# Altium PCB MotorDrive.PcbDoc (part 1 of 2)
Units mm, origin at the board's own origin, x right, y up, seen from the top; angles counter-clockwise.
Board outline 50.27 x 51.27 mm, 4 copper layers (Top Layer, GND, VCC, Bottom Layer), stack 0.603 mm thick; 68 components, 46 nets, 234 pads, 649 vias.
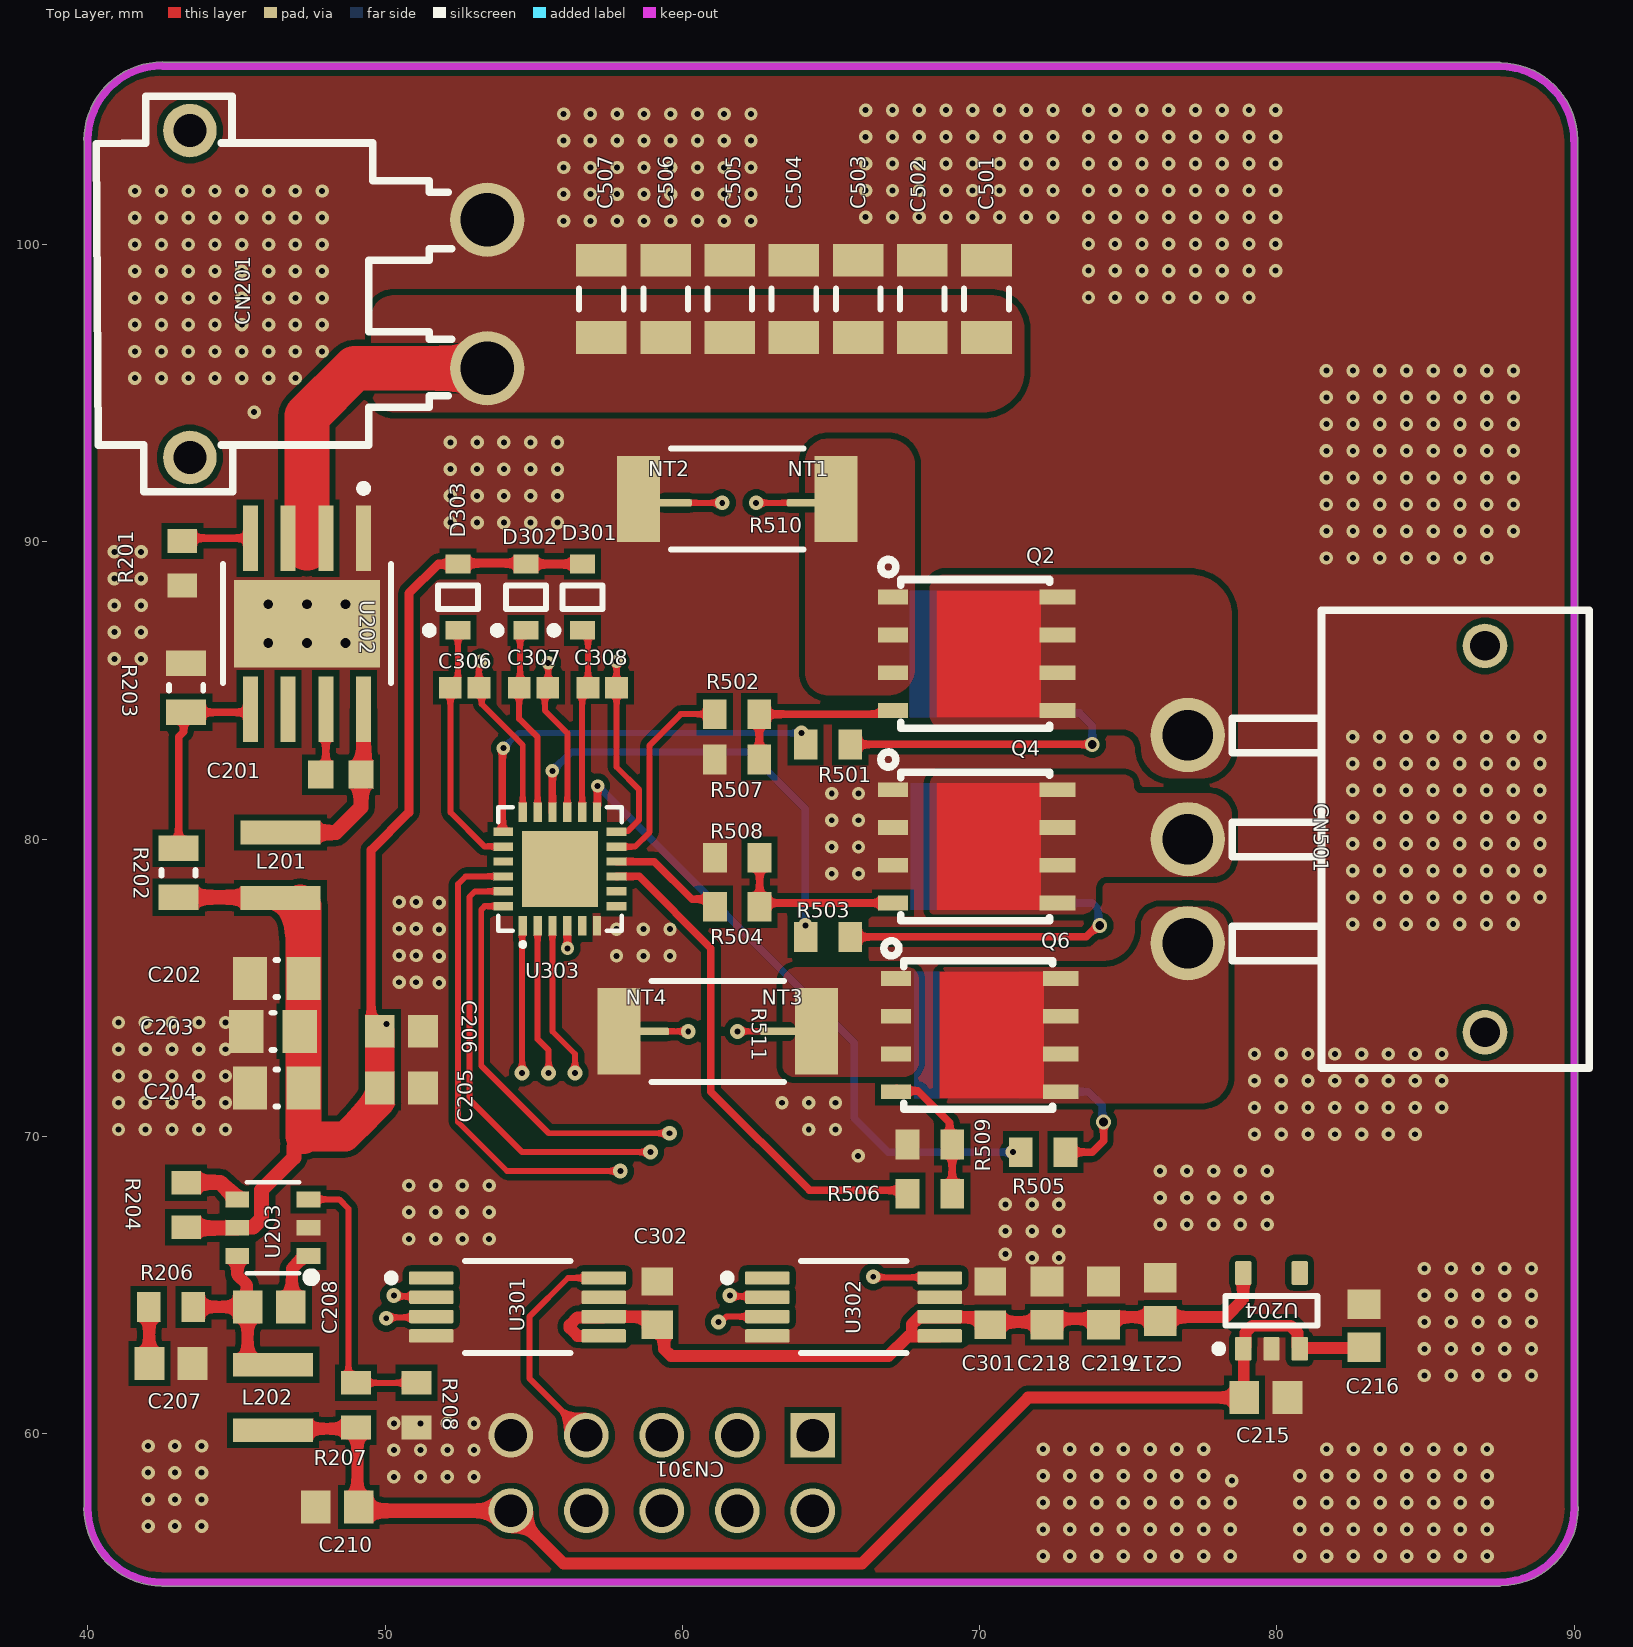
[diagram p0: Top Layer view]
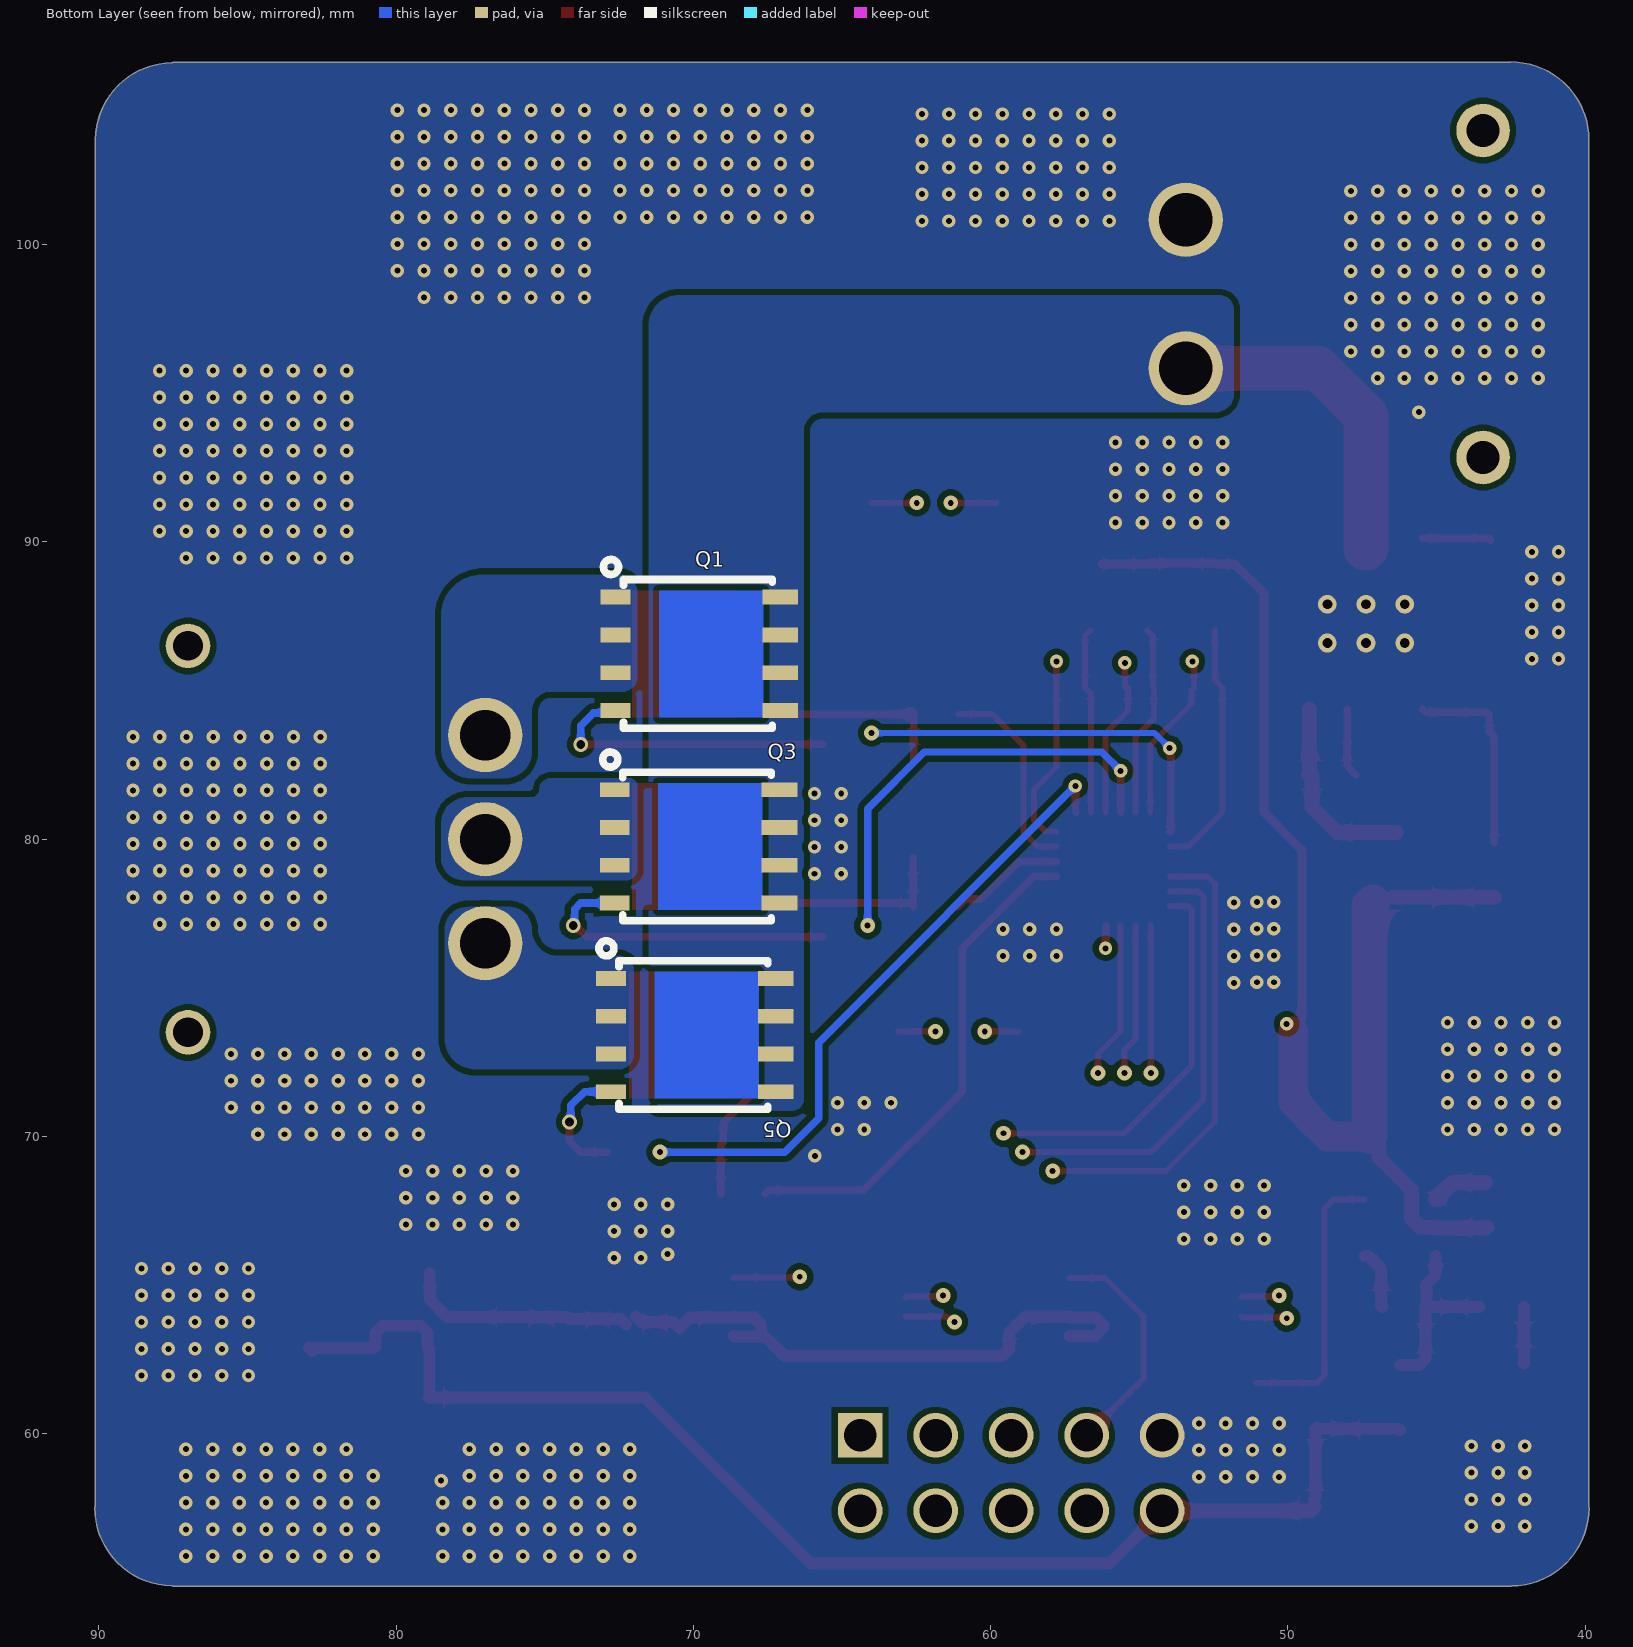
[diagram p1: Bottom Layer view, seen from below]
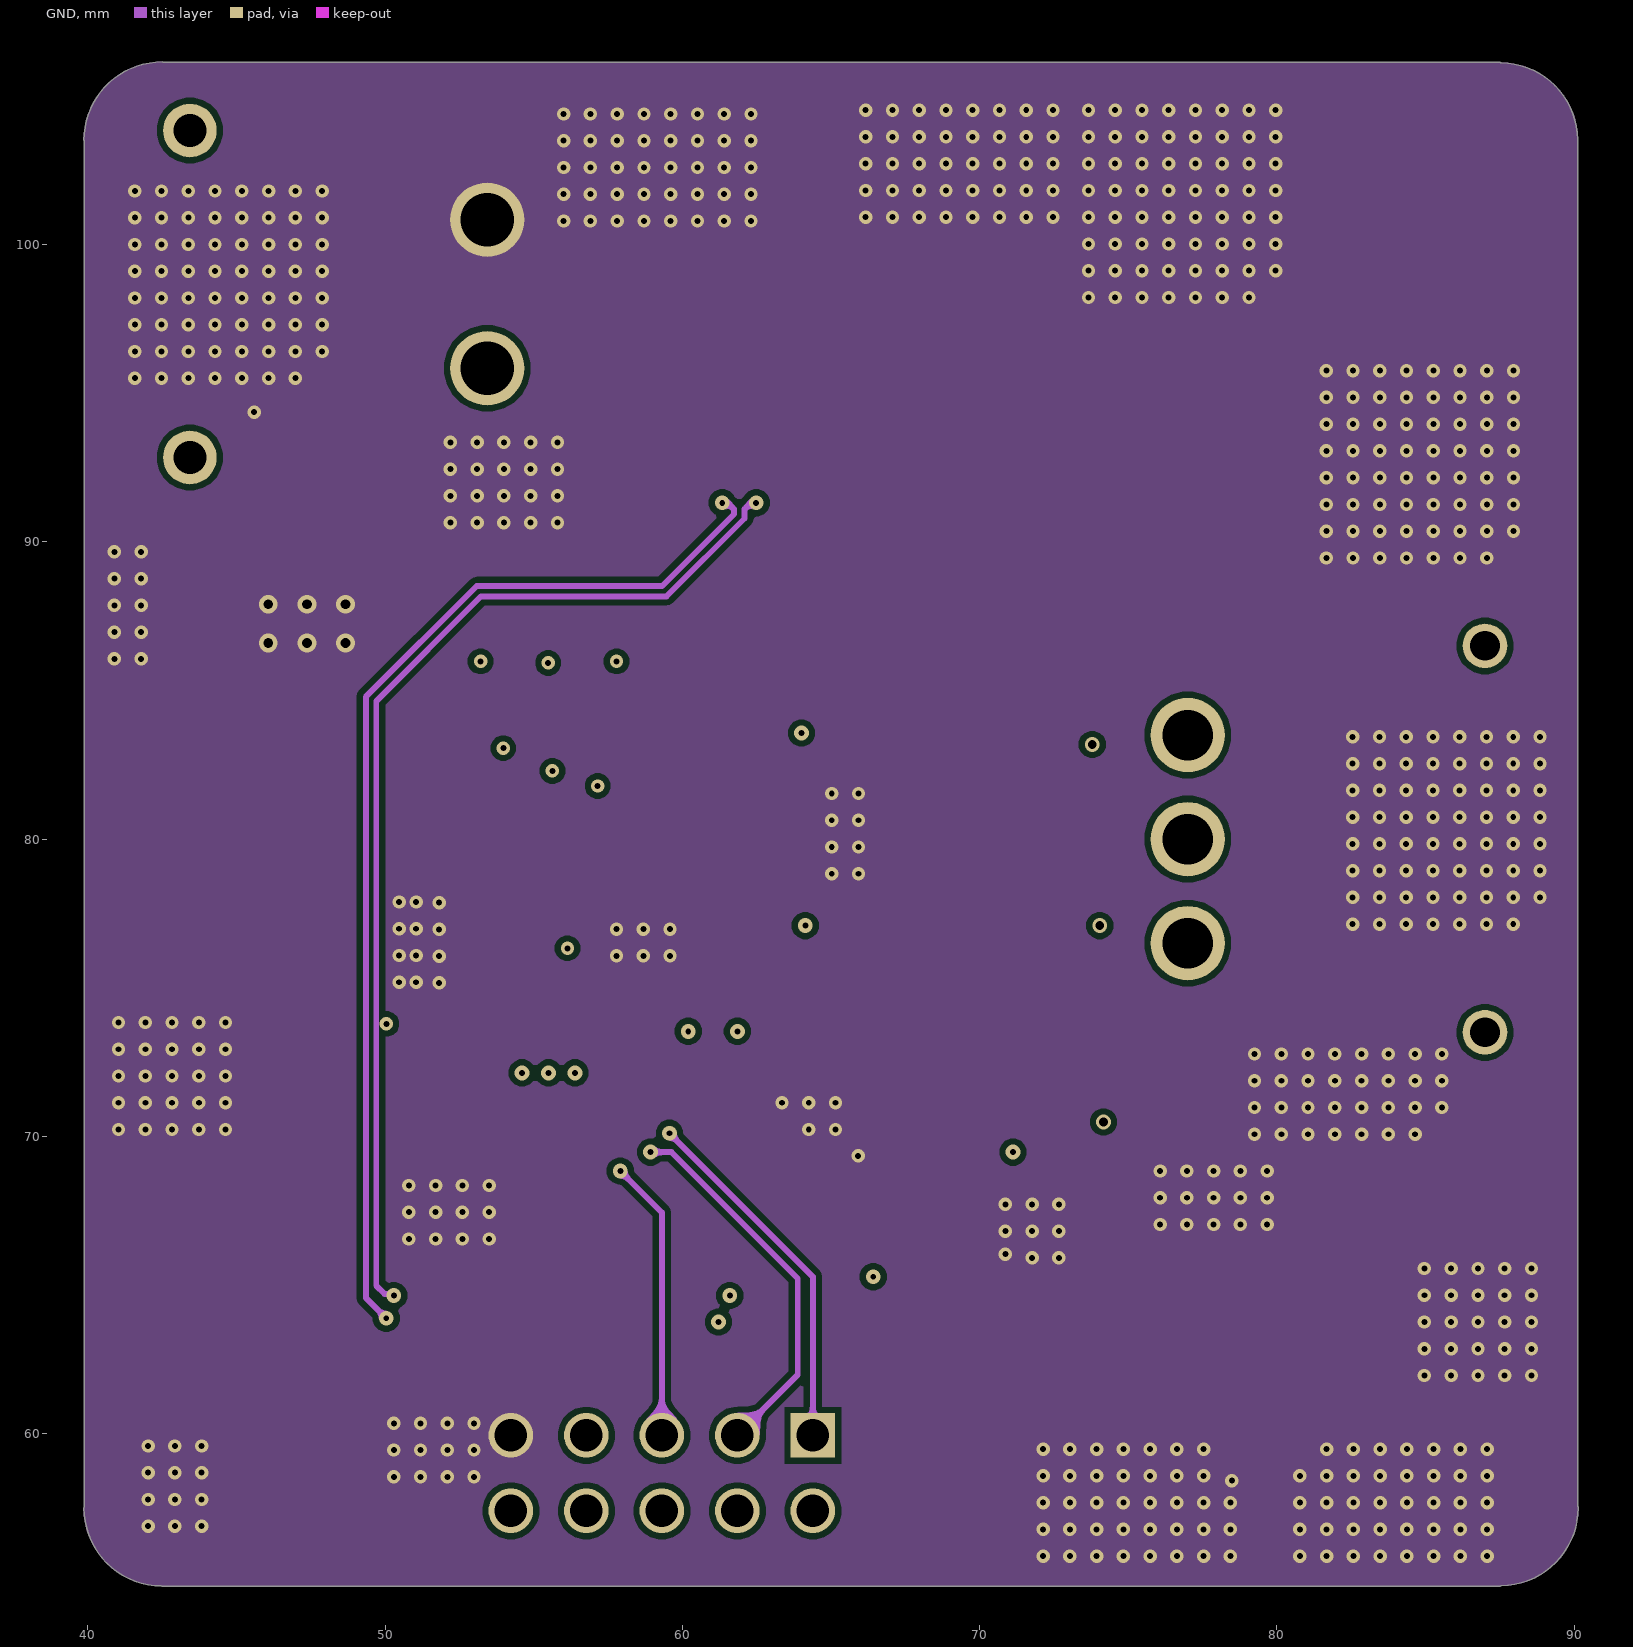
[diagram p2: GND]
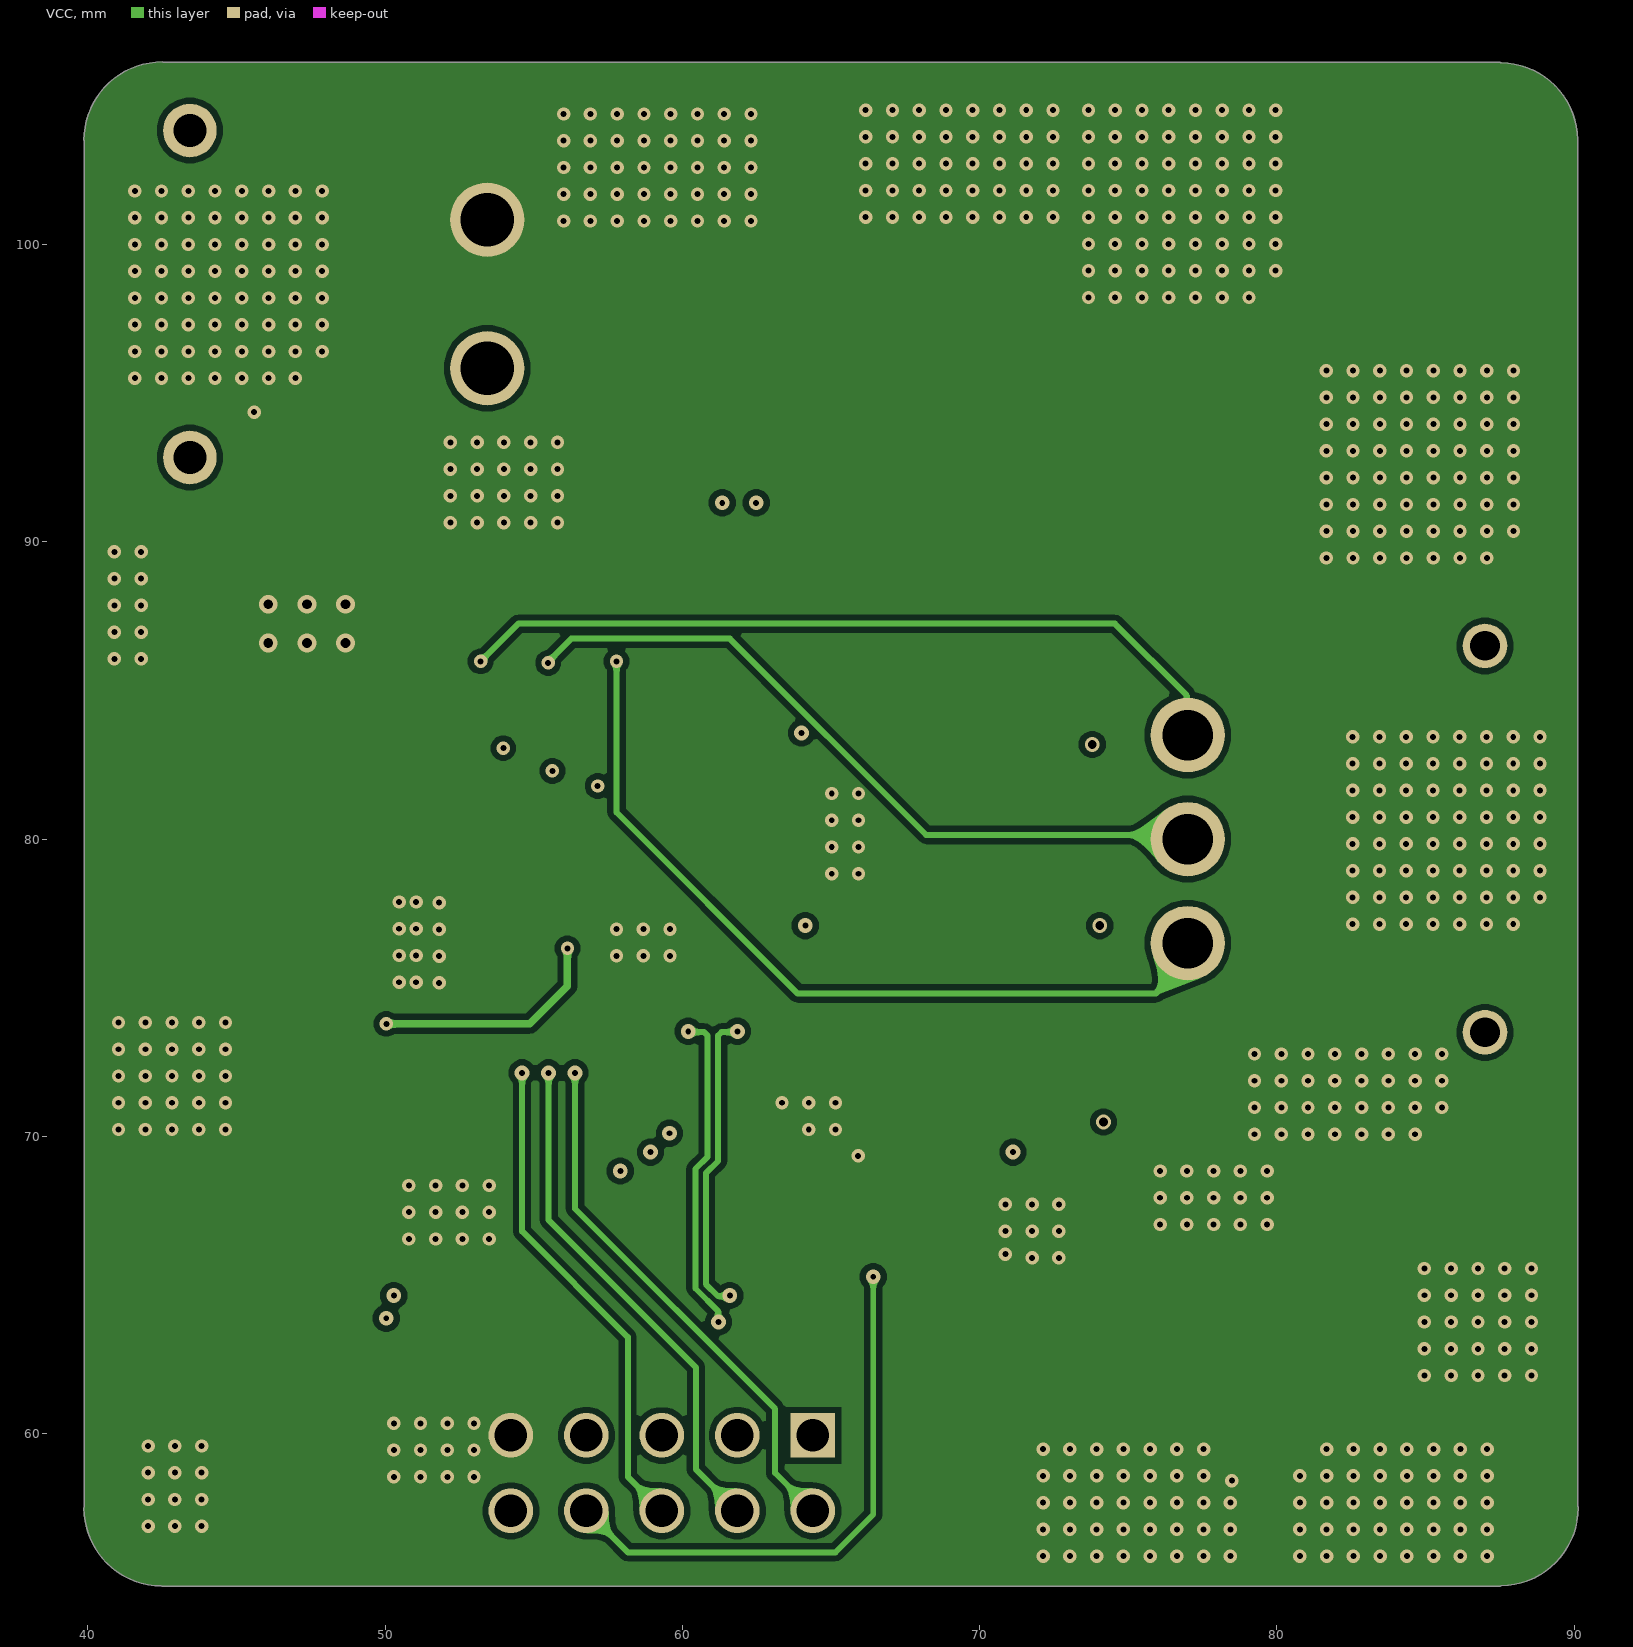
[diagram p3: VCC]
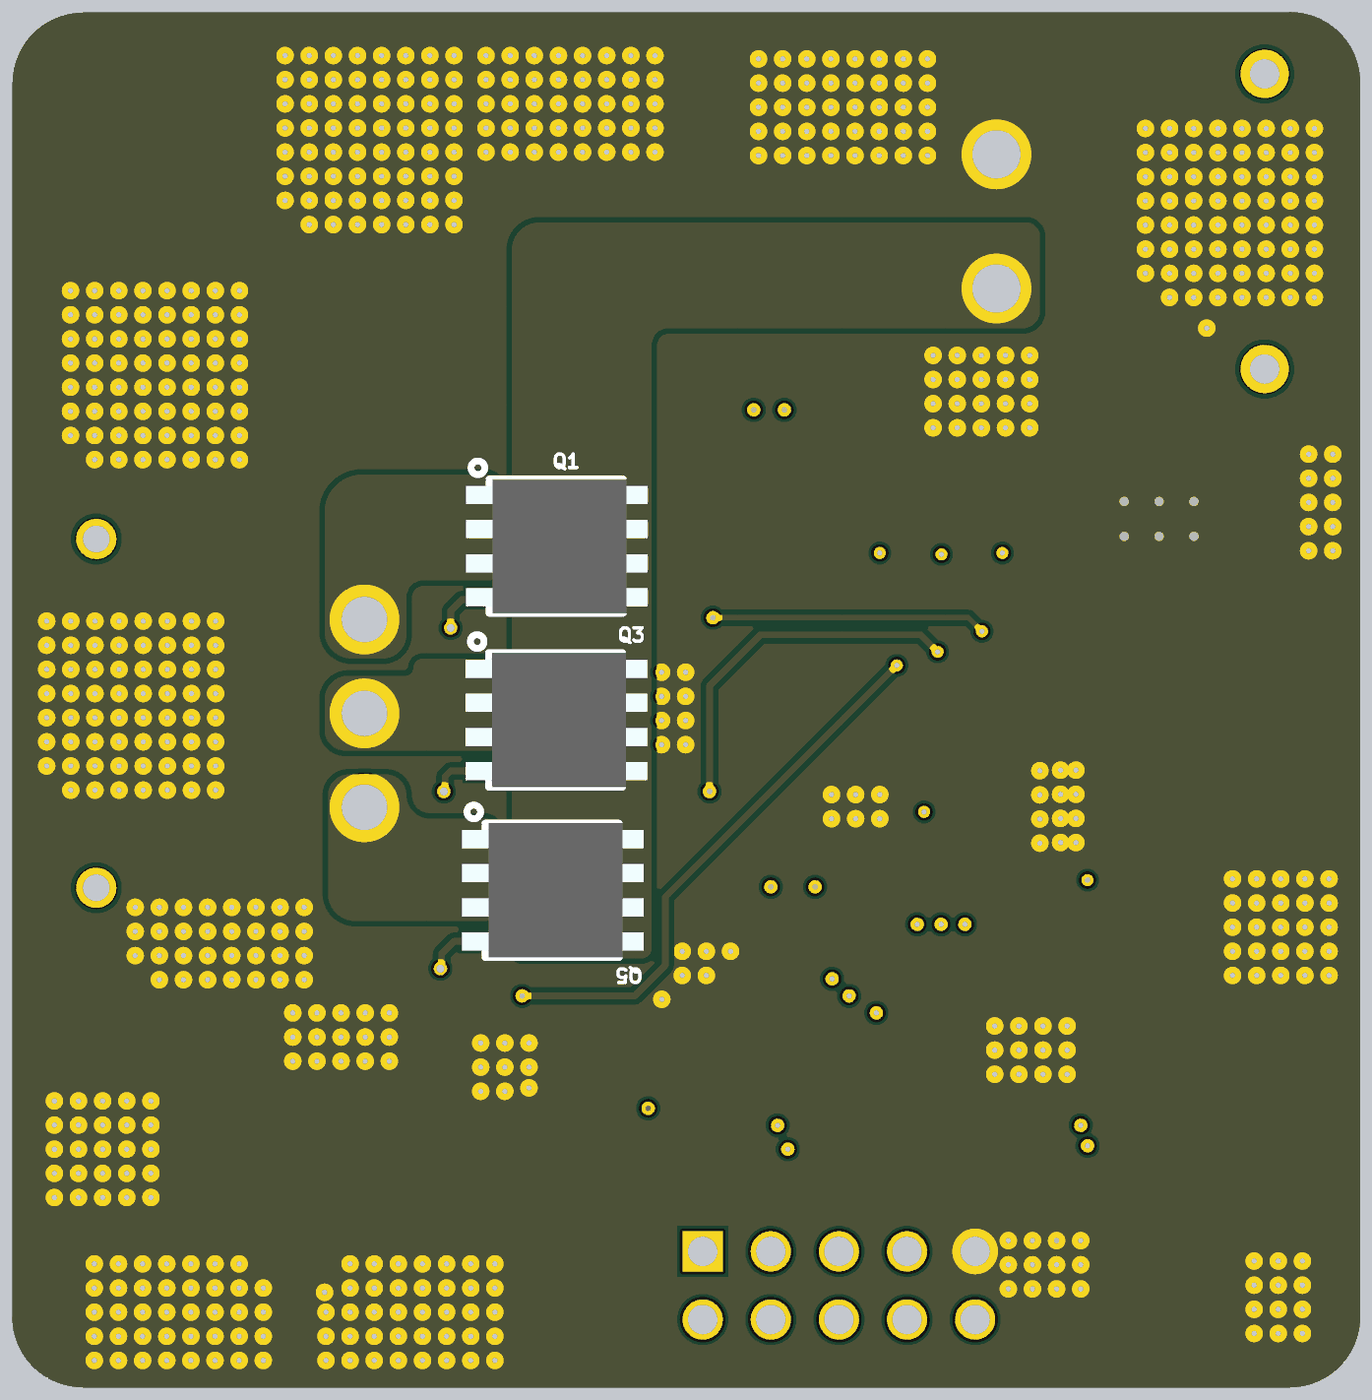
[diagram p4: 3D render of the assembled board from below, using the file's embedded part models]

## Layer stack, top to bottom
Top Solder: solder mask 0.0102, Solder Resist, Dk 3.5
Top Layer: signal copper 0.0356
Dielectric 2: prepreg 0.0711, PP-006, Dk 4.1
GND: signal copper 0.035
Dielectric 1: dielectric 0.32, FR-4, Dk 4.8
VCC: signal copper 0.035
Dielectric 3: prepreg 0.0711, PP-006, Dk 4.1
Bottom Layer: signal copper 0.0356
Bottom Solder: solder mask 0.0102, Solder Resist, Dk 3.5

## Board outline
42.473,54.875 cw(c42.496,57.502) 39.869,57.502 cw(c39.996,57.502) 39.873,57.532 39.873,103.491 cw(c39.998,103.516) 39.87,103.516 cw(c42.498,103.516) 42.498,106.143 cw(c42.498,106.016) 42.559,106.127 87.494,106.127 cw(c87.494,106) 87.539,106.119 cw(c87.494,103.492) 90.121,103.531 cw(c90,103.492) 90.127,103.492 90.127,57.548 cw(c90.007,57.507) 90.134,57.507 cw(c87.507,57.507) 87.55,54.88 cw(c87.507,55) 87.507,54.873 42.496,54.873 cw(c42.496,55)

## Design rules (kind name [scope] priority, off if disabled: settings)
Clearance [All] p1: gap=0.2 ignorepadtopadclearanceinfootprint=FALSE except(0: Arc-Hole Track-Hole SMDPad-Hole THPad-Hole Via-Hole Fill-Hole Poly-Hole Region-Hole Text-Hole; 0.013: Arc-SMDPad Arc-THPad Arc-Via Arc-Text Track-SMDPad Track-THPad Track-Via Track-Text SMDPad-SMDPad SMDPad-THPad SMDPad-Via SMDPad-Text THPad-THPad THPad-Via THPad-Text Via-Via Via-Text Fill-Text Poly-Text Region-Text Text-Text; 0.15: Arc-Arc Arc-Track Track-Track)
ComponentClearance [All] p1 off: gap=0.254 collisioncheckmode=3 verticalgap=0.254 showdistances=FALSE
DiffPairsRouting DiffPairsRouting_1 [InDifferentialPair ('NewDifferentialPair2')] p1: maxlimit=0.254 minlimit=0.15 mostfreqgap=0.254 toplayer_minwidth=0.381 toplayer_maxwidth=0.381 toplayer_prefwidth=0.381 midlayer1_minwidth=0.381 midlayer1_maxwidth=0.381 midlayer1_prefwidth=0.381 midlayer2_minwidth=0.381 midlayer2_maxwidth=0.381 midlayer2_prefwidth=0.381 bottomlayer_minwidth=0.381 bottomlayer_maxwidth=0.381 bottomlayer_prefwidth=0.381 maxuncoupledlength=12.7
DiffPairsRouting DiffPair_DiffPairsRouting [InDifferentialPair ('NewDifferentialPair1')] p2: maxlimit=0.254 minlimit=0.15 mostfreqgap=0.15 toplayer_maxgap=0.15 toplayer_minwidth=0.15 toplayer_maxwidth=0.381 toplayer_prefwidth=0.381 midlayer1_minwidth=0.15 midlayer1_maxwidth=0.381 midlayer1_prefwidth=0.381 midlayer2_minwidth=0.15 midlayer2_maxwidth=0.381 midlayer2_prefwidth=0.381 bottomlayer_maxgap=0.15 bottomlayer_minwidth=0.15 bottomlayer_maxwidth=0.381 bottomlayer_prefwidth=0.381 maxuncoupledlength=12.7
DiffPairsRouting [All] p3: maxlimit=0.15 minlimit=0.15 mostfreqgap=0.15 toplayer_minwidth=0.15 toplayer_maxwidth=0.381 toplayer_prefwidth=0.15 midlayer1_minwidth=0.15 midlayer1_maxwidth=0.381 midlayer1_prefwidth=0.15 midlayer2_minwidth=0.15 midlayer2_maxwidth=0.381 midlayer2_prefwidth=0.15 bottomlayer_minwidth=0.15 bottomlayer_maxwidth=0.381 bottomlayer_prefwidth=0.15 maxuncoupledlength=12.7
MatchedLengths [InDifferentialPair ('NewDifferentialPair2')] p1: tolerance=25.4 checknetsindiffpair=FALSE checkdiffpairvsdiffpair=TRUE checkxsignals=TRUE checkothers=TRUE
MatchedLengths DiffPair_MatchedLengths [InDifferentialPair ('NewDifferentialPair1')] p2: tolerance=25.4 checknetsindiffpair=FALSE checkdiffpairvsdiffpair=TRUE checkxsignals=TRUE checkothers=TRUE
MinimumSolderMaskSliver [All] p1 off: minsoldermaskwidth=0.01
PlaneConnect [All] p1: planeconnectstyle=Direct reliefexpansion=0.508 reliefentries=4 reliefconductorwidth=0.254 reliefairgap=0.254
PolygonConnect [All] p1: connectstyle=Direct reliefconductorwidth=0.254 reliefentries=4 polygonreliefangle="90 Angle" airgapwidth=0.254
RoutingVias [All] p1: holewidth=0.711 width=1.27 viastyle="Through Hole" minholewidth=0.1 minwidth=0.1 maxholewidth=10 maxwidth=10
SilkToSilkClearance [All] p1: silktosilkclearance=0
SilkToSolderMaskClearance [IsPad] p1: minsilkscreentomaskgap=0 clearancetoexposedcopper=TRUE
SolderMaskExpansion [All] p1: expansion=0.102 istentingtop=FALSE
Width [All] p1: maxlimit=10 minlimit=0.1 preferedwidth=0.2 minimp=50.000000 maximp=50.000000 favimp=50.000000
24 further rules are at their usual default settings.

## Classes and differential pairs
component class MOSFETS: C501 C502 C503 C504 C505 C506 C507 CN501 NT1 NT2 NT3 NT4 Q1 Q2 Q3 Q4 Q5 Q6 R501 R502 R503 R504 R505 R506 R507 R508 R509 R510 R511
component class Designator: C201 C202 C203 C204 C205 C206 C207 C208 C210 C215 C216 C217 C218 C219 CN201 L201 L202 R201 R202 R203 R204 R206 R207 R208 U202 U203 U204
differential pair SH1: +SH1_P -SH1_N
differential pair SH2: +SH2_P -SH2_N

## Components (designator, comment, footprint, x,y, rotation, side; value= is the part's Value field where it differs from the comment)
C201 "22uf" CAPC1608X90X35NL10T15 48.514,82.169 r0 top
C202 "100nf" CAPC0805(2012)145_N 46.355,75.311 r0 top value=220nF
C203 "22uf" CAPC0805(2012)145_N 46.228,73.533 r0 top value=220nF
C204 "22uf" CAPC0805(2012)145_N 46.355,71.628 r0 top value=220nF
C205 "4.7uf" CAPC1608X87X35ML15T15 50.546,71.628 r180 top
C206 "100nf" CAPC1608X87X35ML15T15 50.546,73.533 r180 top
C207 "470pf" CAPC1608X87X35ML15T15 42.799,62.357 r0 top
C208 "100nf" CAPC1608X87X35ML15T15 46.101,64.262 r0 top
C210 "10uf" CAPC1608X87X35ML15T15 48.387,57.531 r0 top
C215 "100nd" CAPC1608X87X35ML15T15 79.629,61.214 r180 top
C216 "22uf" CAPC1608X87X35ML15T15 82.931,63.627 r270 top
C217 "100nf" CAPC1608X87X35ML15T15 76.073,64.516 r270 top
C218 "22uf" CAPC1608X87X35ML15T15 72.263,64.389 r270 top
C219 "22uf" CAPC1608X87X35ML15T15 74.168,64.389 r270 top
C301 "100nf" CAPC1608X90X35ML10T15 70.358,64.389 r270 top
C302 "100nf" CAPC1608X90X35ML10T15 59.154,64.389 r270 top
C306 "100nf 50V" CAPC1005X60X30ML05T10 52.677,85.09 r0 top
C307 "100nf 50V" CAPC1005X60X30ML05T10 54.991,85.09 r0 top
C308 "100nf 50V" CAPC1005X60X30ML05T10 57.305,85.09 r180 top
C501 "100nf" AVX-1206-2_L 70.231,98.171 r270 top
C502 "100nf" AVX-1206-2_L 68.072,98.171 r270 top
C503 "100nf" AVX-1206-2_L 65.913,98.171 r270 top
C504 "100nf" AVX-1206-2_L 63.754,98.171 r270 top
C505 "10nf" AVX-1206-2_L 61.595,98.171 r270 top
C506 "10nf" AVX-1206-2_L 59.436,98.171 r270 top
C507 "10nf" AVX-1206-2_L 57.277,98.171 r270 top
CN201 "XT30PW-M" CONN-TH_XT30PW-M 48.434,98.337 r270 top
CN301 "" 2X10Pin 59.309,58.674 r270 top
CN501 "MR30PW" MR30 82,80 r90 top locked
D301 "BAT54HT1G" ONSC-SOD-323-2-477-02_V 56.642,88.138 r90 top
D302 "BAT54HT1G" ONSC-SOD-323-2-477-02_V 54.737,88.138 r90 top
D303 "BAT54HT1G" ONSC-SOD-323-2-477-02_V 52.451,88.138 r90 top
L201 "33uH" TAYO-IND0315_V 46.482,79.121 r270 top
L202 "10uH" TAYO-IND0315_V 46.228,61.214 r270 top
NT1 "Net_Tie" NT 64.262,91.313 r0 top net-tie
NT2 "Net_Tie" NT 59.563,91.313 r180 top net-tie
NT3 "Net_Tie" NT 63.373,73.533 r0 top net-tie
NT4 "Net_Tie" NT 58.801,73.533 r180 top net-tie
Q1 "TPH1R403NL" DSOP-8_L5.0-W5.0-P1.27-EP-TL 69.85,86.233 r270 bottom
Q2 "TPH1R403NL" DSOP-8_L5.0-W5.0-P1.27-EP-TL 69.85,86.233 r270 top
Q3 "TPH1R403NL" DSOP-8_L5.0-W5.0-P1.27-EP-TL 69.875,79.756 r270 bottom
Q4 "TPH1R403NL" DSOP-8_L5.0-W5.0-P1.27-EP-TL 69.85,79.756 r270 top
Q5 "TPH1R403NL" DSOP-8_L5.0-W5.0-P1.27-EP-TL 70.002,73.406 r270 bottom
Q6 "TPH1R403NL" DSOP-8_L5.0-W5.0-P1.27-EP-TL 69.952,73.406 r270 top
R201 "100K" RESC1608X55X25ML10T15 43.18,89.281 r90 top
R202 "330K" RESC2013X50X30LL20T20 43.053,78.867 r270 top
R203 "47K" RESC2013X50X30LL20T20 43.307,85.09 r90 top
R204 "100K" RESC1608X55X25ML10T15 43.307,67.691 r90 top
R206 "10R" RESC1608X55X25ML10T15 42.799,64.262 r0 top
R207 "124K" RESC1608X55X25ML10T15 49.022,60.96 r90 top
R208 "23.7K" RESC1608X55X25ML10T15 51.054,60.96 r90 top
R501 "4R7" RESC1608X55X25ML10T15 64.897,83.185 r0 top
R502 "4R7" RESC1608X55X25ML10T15 61.837,84.201 r0 top
R503 "4R7" RESC1608X55X25ML10T15 64.897,76.708 r0 top
R504 "4R7" RESC1608X55X25ML10T15 61.849,77.724 r0 top
R505 "4R7" RESC1608X55X25ML10T15 72.136,69.469 r0 top
R506 "4R7" RESC1608X55X25ML10T15 68.326,68.072 r0 top
R507 "39K" RESC1608X55X25ML10T15 61.837,82.677 r0 top
R508 "39K" RESC1608X55X25ML10T15 61.849,79.375 r0 top
R509 "39K" RESC1608X55X25ML10T15 68.326,69.723 r0 top
R510 "ERJ-1TRQFR22U" FP-ERJ1TR-MFG 61.849,91.44 r180 top value=0.22Ω
R511 "ERJ-1TRQFR22U" FP-ERJ1TR-MFG 61.191,73.533 r180 top value=0.22Ω
U202 "LM5164DDAT" FP-DDA0008E-MFG 47.371,87.249 r270 top
U203 "MP2456GJ-Z" TSOT-23-6_L2.9-W1.6-P0.95-LS2.8-BR 46.228,66.929 r0 top
U204 "LP5907MFX-3.3/NOPB" DBV0005A_L 79.817,64.13 r90 top
U301 "INA240A2PWR" FP-PW0008A-MFG 54.455,64.262 r0 top
U302 "INA240A2PWR" FP-PW0008A-MFG 65.758,64.262 r0 top
U303 "FD6288Q" QFN-24_L4.0-W4.0-P0.50-BL-EP2.6 55.88,78.994 r0 top

## Footprints (in the part's own frame and the unit in brackets; to place one, negate y for a bottom-side part, rotate by r counter-clockwise, add the part's x,y. Pads: shape width x height; smd on the part's side, far side on the other; paste and mask are expansions set on the pad)
2X10Pin [mm] "P"
  rect 1.5x1.5 hole 1.1: 1(-1.27,5.08)
  round 1.5 hole 1.1: 2(-1.27,2.54) 3(-1.27,0) 4(-1.27,-2.54) 5(-1.27,-5.08) 6(1.27,-5.08) 7(1.27,-2.54) 8(1.27,0) 9(1.27,2.54) 10(1.27,5.08)
AVX-1206-2_L [mm] "SMD, 2-Leads, Body 3.4x1.8mm, IPC High Density"
  rect 1.1x1.7 smd: 1(-1.3,0) 2(1.3,0)
  silkscreen extent -0.35,-0.75 0.35,0.75, body extent -1.7,-0.9 1.7,0.9, height 1.52
CAPC0805(2012)145_N [mm] "Chip Capacitor, Body 2.0x1.2mm, Height 1.45mm, IPC Medium Density"
  rect 1.15x1.45 smd: 1(-0.9,0) 2(0.9,0)
  silkscreen extent -0.05,-0.62 0.05,0.63, body extent -1.1,-0.72 1.1,0.73, height 1.45
CAPC1005X60X30ML05T10 [mm] "Chip Capacitor, 2-Leads, Body 1.00x0.50mm, IPC Low Density"
  rect 0.76x0.72 smd: 1(-0.48,0) 2(0.48,0)
  body extent -0.53,-0.28 0.53,0.27, height 0.6
CAPC1608X87X35ML15T15 [mm] "Chip Capacitor, 2-Leads, Body 1.60x0.80mm, IPC Low Density"
  rect 1x1.1 smd: 1(-0.725,0) 2(0.725,0)
  body extent -0.87,-0.48 0.87,0.47, height 0.87
CAPC1608X90X35ML10T15 [mm] "Chip Capacitor, 2-Leads, Body 1.7x0.9mm, IPC Low Density"
  rect 0.95x1.05 smd: 1(-0.725,0) 2(0.725,0)
  body extent -0.85,-0.45 0.85,0.45, height 0.9
CAPC1608X90X35NL10T15 [mm] "Chip Capacitor, 2-Leads, Body 1.60x0.80mm, IPC Medium Density"
  rect 0.85x0.95 smd: 1(-0.675,0) 2(0.675,0)
  body extent -0.85,-0.45 0.85,0.45, height 0.9
CONN-TH_XT30PW-M [mm]
  round 2.5 hole 1.8 mask+0.051: 1(-2.5,5) 2(2.5,5)
  round 1.8 hole 1.1 mask+0.051: 3(5.5,-5) 4(-5.5,-5)
  silkscreen extent -6.65,-8.15 6.65,3.81
DBV0005A_L [mm] "SOT23, 5-Leads, Body 3.05x1.75mm, Pitch 0.95mm, IPC High Density"
  rrect18% 0.8x0.55 smd: 1(-1.275,0.95) 2(-1.275,0) 3(-1.275,-0.95) 4(1.275,-0.95) 5(1.275,0.95)
  silkscreen extent -1.4,-1.55 0.5,1.9, body extent -1.42,-1.46 1.42,1.46, height 1.08
DSOP-8_L5.0-W5.0-P1.27-EP-TL [mil]
  rect 19.7x39.4 smd mask+1.97: 1(-75,-109) 2(-25,-109) 3(25,-109) 4(75,-109)
  rect 19.7x47.2 smd mask+1.97: 5(75,109.1) 6(25,109.1) 7(-25,109.1) 8(-75,109.1)
  Top Layer region: -83.7,86.6 83.7,86.6 83.7,-51.2 -83.7,-51.2 -83.7,86.6
  silkscreen extent -125,-125 98,98, body extent -98,-132 98,135, height 43
FP-DDA0008E-MFG [mm]
  rect 2.2x0.5 smd paste-1000 mask+0: 1(-2.875,1.905) 2(-2.875,0.635) 3(-2.875,-0.635) 4(-2.875,-1.905) 5(2.875,-1.905) 6(2.875,-0.635) 7(2.875,0.635) 8(2.875,1.905)
  rect 2.95x4.9 smd paste-1000 mask-1000: 9(0,0)
  silkscreen extent -4.67,-2.83 2,2.83, body extent -4.08,-2.68 4.08,2.68, height 0.25
FP-ERJ1TR-MFG [mm]
  rect 1.45x2.9 smd paste+0 mask+0: 1(-3.325,0) 2(3.325,0)
  silkscreen extent -2.22,-1.7 2.22,1.7, body extent -4.15,-1.8 4.15,1.8, height 0.25
FP-PW0008A-MFG [mm]
  rrect22% 1.5x0.45 smd paste+0 mask+0: 1(-2.9,0.975) 2(-2.9,0.325) 3(-2.9,-0.325) 4(-2.9,-0.975) 5(2.9,-0.975) 6(2.9,-0.325) 7(2.9,0.325) 8(2.9,0.975)
  silkscreen extent -4.37,-1.55 1.78,1.55, body extent -3.75,-1.8 3.75,1.8, height 0.25
MR30 [mm]
  round 2.5 hole 1.7 mask+0.05: 1(3.5,5) 2(0,5) 3(-3.5,5)
  round 1.5 hole 1 mask+0.05: 4(6.5,-5) 5(-6.5,-5)
  silkscreen extent -7.7,-8.5 7.7,3.5
NT [mm]
  rrect50% 1x0.25 smd: 0(-0.254,0) 1(0.254,0)
ONSC-SOD-323-2-477-02_V [mm] "SOD, 2-Leads, Body 1.7x1.25mm"
  rect 0.63x0.83 smd: 1(-1.115,0) 2(1.115,0)
  silkscreen extent -1.24,-0.67 0.4,1.09, body extent -0.85,-0.63 0.85,0.63, height 1.06
QFN-24_L4.0-W4.0-P0.50-BL-EP2.6 [mm]
  rect 0.28x0.665 smd mask+0.05: 1(-1.25,-1.908) 2(-0.75,-1.908) 3(-0.25,-1.908) 4(0.25,-1.908) 5(0.75,-1.908) 6(1.25,-1.908) 13(1.25,1.908) 14(0.75,1.908) 15(0.25,1.908) 16(-0.25,1.908) 17(-0.75,1.908) 18(-1.25,1.908)
  rect 0.665x0.28 smd mask+0.05: 7(1.908,-1.25) 8(1.908,-0.75) 9(1.908,-0.25) 10(1.908,0.25) 11(1.908,0.75) 12(1.908,1.25) 19(-1.908,1.25) 20(-1.908,0.75) 21(-1.908,0.25) 22(-1.908,-0.25) 23(-1.908,-0.75) 24(-1.908,-1.25)
  rect 2.55x2.55 smd mask+0.05: 25(0,0)
  silkscreen extent -2.08,-2.61 2.08,2.08
RESC1608X55X25ML10T15 [mm] "Chip Resistor, 2-Leads, Body 1.60x0.80mm, IPC Low Density"
  rect 0.8x1 smd: 1(-0.75,0) 2(0.75,0)
  body extent -0.85,-0.45 0.85,0.45, height 0.55
RESC2013X50X30LL20T20 [mm] "Chip Resistor, 2-Leads, Body 2.00x1.25mm, IPC High Density"
  rect 0.85x1.35 smd: 1(-0.825,0) 2(0.825,0)
  silkscreen extent -0.1,-0.58 0.1,0.58, body extent -1.1,-0.72 1.1,0.72, height 0.5
TAYO-IND0315_V [mm] "SMT Inductor, 2 Leads, Body 3x3 mm"
  rect 0.8x2.7 smd: 1(-1.1,0) 2(1.1,0)
  body extent -1.5,-1.5 1.5,1.5, height 1.5
TSOT-23-6_L2.9-W1.6-P0.95-LS2.8-BR [mil]
  rect 31.5x20.9 smd mask+2: 1(47.2,-37.4) 2(47.2,0) 3(47.2,37.4) 4(-47.2,37.4) 5(-47.2,0) 6(-47.2,-37.4)
  silkscreen extent -34,-72 57,60

## Part data
C201: library part CMP-2006-02792-1, Manufacturer=Murata, Part Number=GRM188R60J106ME47D
C202 C203 C204: library part CMP-1036-04552-1, "CAP 220nF 50V ±10% 0805 (2012 Metric) Thickness 1.45mm SMD", Case-EIA=0805, Case-Metric=2012, Rated Voltage="50 V", Tolerance=Â±10%, Max Thickness="1.45 mm", Technology=SMT
C205 C206 C207 C208 C210 C215 C216 C217 C218 C219: library part CMP-2006-03046-1, Manufacturer=Kemet, Part Number=C0603C103K5RAC7867
C301 C302: library part CMP-2100-03642-1, "Chip Capacitor, 10 nF, +/- 10%, 50 V, -55 to 125 degC, 0603 (1608 Metric), RoHS, Tape and Reel", Capacitance=10nF, Case Code (Imperial)=0603, Case Code (Metric)=1608, Dielectric=X7R, Dielectric Material=Ceramic, Insulation Resistance=10GR, Manufacturer=Murata, Max Operating Temperature=125degC, Min Operating Temperature=-55degC, Package Description="2-Pin Surface Mount Device, Body 1.6 x 0.8 mm", Package Quantity=1, Tolerance=10%, Voltage=50V, Case/Package=0603, Datasheet URL=http://search.murata.co.jp/Ceramy/image/img/A01X/G101/ENG/GRM188R71H103KA01-01.pdf, Datasheet Version=42401.0, Depth=0.8mm, Height=0.8mm, Lead Free=LeadFree, Length=1.6mm, Manufacturer URL=http://www.murata.com/, Material=Ceramic, Mount=SurfaceMount, Number of Pins=2, Package Reference=0603, Packaging=TapeandReel, REACH SVHC=Unknown, RoHSCompliant=True, Termination=SMD/SMT, Thickness=0.035inch, Voltage Rating=50V, Voltage Rating (DC)=50V, Width=0.031inch
C306 C307 C308: library part CMP-2008-02046-1, Manufacturer=Kemet, Part Number=C0402C104K8PACTU
C501 C502 C503 C504 C505 C506 C507: library part CMP-2000-05468-1, "Chip Capacitor, 1 nF, +/- 10%, -55 to 125 degC, 1206 (3216 Metric), RoHS, Tape and Reel", Capacitance=0.001uF, Case Size/Dimension=1206, Dielectric=X7R, Manufacturer=AVX, Package Description="2-Pin SMD, Body 3.4 x 1.8 mm", PartNumber=1206GC102KAT1A, Rated Voltage=2000V, Tolerance=10%, Tolerance (%)=±10%, Datasheet URL=https://datasheet.ciiva.com/11787/0900766b80ed4c37-11787781.pdf, Datasheet Version=11/2010, Manufacturer URL=http://www.avx.com/, Mounting Technology=SurfaceMount, Package Reference=1206, Voltage Rating DC=2000V
CN201: JLCPCB Part Class="Extended Part", LCSC Part Name=XT30PW-M公头, Manufacturer=AMASS(艾迈斯), Add into BOM=yes, Convert to PCB=yes, Datasheet=https://atta.szlcsc.com/upload/public/pdf/source/20220222/6A9F22F7850E25B33E1BE430ADF8560B.pdf, Device=XT30PW-M, Manufacturer Part=XT30PW-M, Supplier=LCSC, Supplier Footprint="Through Hole", Supplier Part=C431092, Symbol=XT30PW-M
CN301 CN501: library part Component_1
D301 D302 D303: library part CMP-1055-00462-1, "Schottky Barrier Diode, 2-Pin SOD-323, Pb-Free, Tape and Reel", Manufacturer="On Semiconductor", ComponentLink1Description="Manufacturer URL", ComponentLink1URL=http://www.onsemi.com/, ComponentLink2Description=Datasheet, ComponentLink2URL=http://www.onsemi.cn/pub_link/Collateral/BAT54HT1-D.PDF, ComponentLink3Description="Package Specification", ComponentLink3URL=http://www.onsemi.com/pub_link/Collateral/477-02.PDF.1, Configuration=Single, DatasheetVersion="Rev. 6", IFSM Max (A)=0.6, Mounting Technology="Surface Mount", PackageDescription="2-Pin SOD, Body 1.7 x 1.25 mm", PackageReference=SOD-323-2-477-02, PackageVersion="Rev. H, 03/2007", Packing="Tape and Reel", PartNumber=BAT54HT1G, RoHS=TRUE, trr Max (ns)=5
L201 L202: library part CMP-0569-00001-2, "SMD Power Inductor, 2.2 uH, +/- 20%, 3 x 3 x 1.5 mm, -25 to 120 degC, Pb-Free, Tape and Reel", Avg. of DC. Resistance="0.06 Ohm", Case Size=3015, DC Resistance (max)="0.072 Ohm", Inductance="2.2 uH (+/-20%)", Inductance Measuring Frequency="100 kHz", Manufacturer="Taiyo Yuden", PartNumber=NR3015T2R2M, Rated Current-Saturation Current="1480 mA", Rated Current-Temperature Rise Current="1500 mA", Self-Resonant Frequency (min)="64 MHz", Temperature Range="-25 to 120 degC", ComponentLink1Description="Manufacturer URL", ComponentLink1URL=www.yuden.co.jp, ComponentLink2Description=Datasheet, ComponentLink2URL=http://www.yuden.co.jp/ut/product/category/inductor/NR3015T2R2M.pdf, DatasheetVersion=1/11/2013, Halogen Free=TRUE, Mounting Technology="Surface Mount", PackageDescription="2-Pin SMT Inductor, Body 3 x 3 mm", PackageReference=IND3015, Packing="Tape and Reel", RoHS Compliance=TRUE, Soldering Method=Reflow
Q1 Q2 Q3 Q4 Q5 Q6: Continuous Drain Current (Id)=150A, Drain Source On Resistance (RDS(on)@Vgs,Id)=1.4mΩ@10V,30A, Drain Source Voltage (Vdss)=30V, Gate Threshold Voltage (Vgs(th)@Id)=2.3V@500A, JLCPCB Part Class="Extended Part", LCSC Part Name="N沟道 30V 150A", Manufacturer=TOSHIBA(东芝), Power Dissipation (Pd)=64W, Add into BOM=yes, Convert to PCB=yes, Datasheet=https://atta.szlcsc.com/upload/public/pdf/source/20170908/C83440_1504870121708958077.pdf, Device=TPH1R403NL, Manufacturer Part=TPH1R403NL, Supplier=LCSC, Supplier Footprint="SOP Advance", Supplier Part=C83440, Symbol=TPH1R403NL, Type=N沟道
R201 R204 R206 R207 R208 R501 R502 R503 R504 R505 R506 R507 R508 R509: library part CMP-2100-03667-1, "Chip Resistor, 0 Ohm, +/- 5%, 0.1 W, -55 to 155 degC, 0603 (1608 Metric), RoHS, Tape and Reel", Case Code (Imperial)=0603, Case Code (Metric)=1608, Manufacturer=Yageo, Max Operating Temperature=155degC, Min Operating Temperature=-55degC, Package Description="2-Pin Surface Mount Device, Body 1.6 x 0.8 mm", Package Quantity=5000, Power Rating=100mW, Resistance=0mOhm, Temperature Coefficient=200ppm/degreesC, Tolerance=5%, Voltage Rating=50V, Case/Package=0603, Composition=ThickFilm, Contact Plating=Tin, Datasheet URL=http://www.yageo.com/NewPortal/yageodocoutput?fileName=/pdf/R-Chip/PYu-RC_Group_51_RoHS_L_5.pdf, Datasheet Version="Rev. 5, 10/2016", Depth=0.8mm, Height=0.45mm, Lead Free=LeadFree, Length=1.6mm, Manufacturer URL=http://www.yageo.com/, Military Standard=Not, Number of Pins=2, Package Reference=0603, Packaging=TapeandReel, Radiation Hardening=No, REACH SVHC=NoSVHC, RoHSCompliant=true, Termination=SMD/SMT, Voltage Rating (DC)=50V, Width=0.8mm
R202 R203: library part CMP-2001-04896-1, Manufacturer="Vishay Dale", Part Number=CRCW08050000Z0EA
R510 R511: library part CMP-05422-000060-1, "RES 0.22 OHM 1% 1W 2512", 3DS Part Number=110-00006, Manufacturer=Panasonic, Package=ERJ1TR, Power Rating=1W, Resistance=0.22Ω, Temperature="-55°C to +155°C", Temperature Coefficient=200ppm/°C, Temperature Range High=+155°C, Temperature Range Low=-55°C, Tolerance=1%, Automotive=Yes, Automotive Grade="Grade 0", Category=Res, ComponentLink2Description=Datasheet, ComponentLink2URL=https://industrial.panasonic.com/cdbs/www-data/pdf/RDN0000/AOA0000C313.pdf, Composition="Thick Film", Device Class L1="Passive Components", Device Class L2=Resistors, Device Class L3="Chip SMD Resistors", Digikey Description="RES 0.22 OHM 1% 1W 2512", Footprint Url=https://industrial.panasonic.com/cdbs/www-data/pdf/RDN0000/DMN0000COL17.pdf, Height=0.7mm, Ipc Land Pattern Name=RESC640320X60, Lead Free=Yes, Manufacturer Part Number=ERJ-1TRQFR22U, Mouser Description="Current Sense Resistors 2512 0.22ohm 1% Curr Sense AEC-Q200", Octopart=https://octopart.com/erj1trqfr22u-panasonic-10566390, RoHS=TRUE, Series=ERJ
U202: library part CMP-04918-000052-1, "IC REG BUCK ADJUSTABLE 1A 8SOPWR", Manufacturer="Texas Instruments", Max Junction Temp=+150°C, Max Supply Voltage=100V, Min Supply Voltage=6V, Nominal Supply Current=600uA, Output Current=1A, Output Voltage=1.2-90V, Package=DDA0008E, Switching Frequency=1000kHz, Temperature="-40°C to +150°C", Temperature Range Low=-40°C, Automotive=No, Category=IC, ComponentLink2Description=Datasheet, ComponentLink2URL=http://www.ti.com/lit/ds/symlink/lm5164.pdf, Device Class L1="Integrated Circuits (ICs)", Device Class L2="Power Management ICs", Device Class L3="Voltage Regulators - Switching", Digikey Description="IC REG BUCK ADJUSTABLE 1A 8SOPWR", Height=1.7mm, Ipc Land Pattern Name=SOIC127P600X170-8, Lead Free=Yes, Manufacturer Part Number=LM5164DDAT, Max Duty Cycle=100%, Mouser Description="6-V to 100-V input, 1-A synchronous buck DC-DC converter with ultra-low IQ 8-SO PowerPAD -40 to 150", Number Of Outputs=1, Octopart=https://octopart.com/lm5164ddat-texas+instruments-96785745, Output Type=AdjustableProgrammable, RoHS=TRUE, Standoff Height=0mm, Switching Topology=Buck, Temperature Range High=+150°C
U203: Current - Output=-, JLCPCB Part Class="Extended Part", Add into BOM=yes, Convert to PCB=yes, Device=MP2456GJ-Z, Frequency - Switching=-, Function=-, LCSC Part Name=MP2456GJ-Z, Manufacturer Part=MP2456GJ-Z, Number Of Outputs=-, Output Configuration=-, Output Type=-, Supplier=LCSC, Supplier Footprint=TSOT-23-6, Supplier Part=C88045, Symbol=MP2456GJ-Z, Synchronous Rectifier=-, Topology=-, Voltage - Input (Max)=-, Voltage - Input (Min)=-, Voltage - Output (Max)=-, Voltage - Output (Min/Fixed)=-
U204: library part CMP-2000-07464-1, "Ultra-Low-Noise, Low-IQ LDO, 0.25 A, Fixed 3.3 V Output, 2.2 to 5.5 V Input, -40 to 125 degC, 5-Pin SOT-23 (DBV), Green (RoHS & no Sb/Br), Tape and Reel", Case\/Package=SOT-23, Dropout Voltage=250mV, Manufacturer="Texas Instruments", Max Input Voltage=5.5V, Max Operating Temperature=125degC, Max Output Current=250mA, Min Input Voltage=2.2V, Min Operating Temperature=-40degC, Nominal Output Voltage=3.3V, Output Voltage Accuracy=2%, Package Description="5-Pin Small Outline Transistor, Body 2.9 x 1.6 mm, Pitch 0.95 mm", Package Quantity=3000, Package Reference=DBV5, Package Version="4073253-4/N, 12/2014", Power Supply Rejection Ratio (PSRR)=82dB, Quiescent Current=425uA, Accuracy=2%, Contact Plating=Tin, Datasheet URL=http://www.ti.com/lit/ds/symlink/lp5907.pdf, Datasheet Version="Rev. L, 09/2016", Lead Free=LeadFree, Manufacturer URL=http://www.ti.com/, Mount=SurfaceMount, Mounting Technology=SurfaceMount, Number Of Outputs=1, Number of Pins=5, Number of Regulators=1, Output Current=250mA, Output Voltage=3.3V, Package URL=http://www.ti.com/lit/ml/mpds018l/mpds018l.pdf, Packaging=TapeandReel, Polarity=Positive, Radiation Hardening=No, REACH SVHC=NoSVHC, RoHSCompliant=true
U301 U302: library part CMP-04895-000047-1, "IC AMP CURRENT SENSE 8-TSSOP", Ambient Temperature Range High=+125°C, Ambient Temperature Range Low=-40°C, Input Bias Current=90uA, Input Offset Voltage=0.005mV, Manufacturer="Texas Instruments", Max Junction Temp=+150°C, Max Supply Voltage=5.5V, Min Supply Voltage=2.7V, Nominal Supply Current=1.8mA, Package=PW0008A, Temperature="-40°C to +125°C", Voltage Gain=0.05V/mV, Automotive=No, Bandwidth=400kHz, Category=IC, ComponentLink2Description=Datasheet, ComponentLink2URL=http://www.ti.com/lit/ds/symlink/ina240.pdf, Device Class L1="Integrated Circuits (ICs)", Device Class L2="Linear ICs", Device Class L3=Instrumentation, Digikey Description="IC AMP CURRENT SENSE 8-TSSOP", Height=1.2mm, Ipc Land Pattern Name=SOP65P300X120-8, Lead Free=Yes, Manufacturer Part Number=INA240A2PWR, Number Of Channels=1, Octopart=https://octopart.com/ina240a2pwr-texas+instruments-75431049, RoHS=TRUE, Standoff Height=0.05mm, Temperature Range High=+125°C, Temperature Range Low=-40°C
U303: JLCPCB Part Class="Extended Part", Manufacturer="Fortior Tech(峰岹)", Add into BOM=yes, Convert to PCB=yes, Datasheet=https://atta.szlcsc.com/upload/public/pdf/source/20181108/C328453_785547738DB9FC0123219FC22539EFAD.pdf, Device=FD6288Q, LCSC Part Name=FD6288Q, Manufacturer Part=FD6288Q, Supplier=LCSC, Supplier Footprint=QFN-24, Supplier Part=C328453, Symbol=FD6288Q_C328453

## Via types
v1: diameter 0.45, hole 0.2, Top Layer to Bottom Layer, 622 vias
v2: diameter 0.5, hole 0.2, Top Layer to Bottom Layer, 18 vias
v3: diameter 0.63, hole 0.33, Top Layer to Bottom Layer, 6 vias
v4: diameter 0.5, hole 0.3, Top Layer to Bottom Layer, 3 vias

## Nets (pads, with @x,y where several pads share a name; then routed paths per layer and width w, separated by ;. In a path a pad name is that pad's centre, name@x,y a point inside that pad or via, vN(x,y) a via of type N, cw(c..) or ccw(c..) an arc to the next point about the centre after c; other vN are vias at no path point)
+3.3: C217.2 C218.2 C219.2 C301.2 C302.2 U204.5 U301.5 U301.6 U302.5 U302.6 | length 27.9
  Top Layer w0.4: U301.5 56.474,63.287 56.205,63.556 56.205,63.649 56.469,63.912 57.33,63.912 U301.6 58.829,63.937 59.103,63.663 59.11,63.663 59.384,63.389 59.384,62.845 59.619,62.611 66.929,62.611 67.58,63.262 67.802,63.262 ; C302.2 C302.2@59.161,63.664 ; U302.5 68.633,63.262 67.802,63.262 ; C301.2 70.11,63.912 68.683,63.912 U302.6 68.633,63.912 67.952,63.912 67.718,63.678 67.718,63.346 67.802,63.262 ; C301.2@70.457,63.537 70.674,63.754 71.755,63.754 C218.2@71.939,63.938 ; C218.2 72.458,63.859 74.168,63.859 74.231,63.922 76.073,63.922 78.273,63.922 78.867,64.516 U204.5
+5: C210.2 C215.2 C216.2 CN301.6 L202.2 R207.1 U204.1 U204.3 | length 45.2
  Top Layer w0.4: L202.2 46.276,60.162 48.974,60.162 R207.1 49.067,60.165 49.067,57.83 C210.2@49.112,57.785 ; CN301.6 56.007,55.626 66.04,55.626 71.628,61.214 C215.2 78.885,61.233 78.885,62.837 U204.1 78.942,62.93 78.942,63.393 79.176,63.627 80.458,63.627 80.692,63.393 80.692,62.93 U204.3 80.79,62.879 82.713,62.879 82.81,62.781 C216.2
  Top Layer w0.5: C210.2 49.239,57.404 CN301.6
+10: C202.2 C203.2 C204.2 C205.2 C206.2 D301.2 D302.2 D303.2 L201.2 R202.2 R204.1 U203.5 U303.4 | length 53.5
  Top Layer w0.25: U303.4 56.132,77.084 56.132,76.329 v1(56.134,76.327)
  Top Layer w0.3: C206.2@49.657,73.697 C206.2 ; v1(50.04,73.785) 49.678,73.785 49.53,73.933 49.53,79.629 50.8,80.899 50.8,88.265 51.788,89.253 D303.2 ; D303.2@52.451,89.281 54.709,89.281 D302.2 ; 54.229,89.253 D302.2 ; D301.2@56.261,89.253 D302.2
  Top Layer w0.5: R202.2 L201.2@46.482,78.042 ; R204.1 43.334,66.914 45.014,66.914 U203.5 45.045,66.944 45.554,66.944 45.847,67.237 45.847,68.199 46.93,69.282 46.93,69.652 47.255,69.977
  Top Layer w1: 47.255,69.977 47.273,69.995 48.659,69.995 49.821,71.157 C205.2 C206.2
  Top Layer w1.2: L201.2@47.148,77.871 47.255,77.764 C202.2 C204.2 47.255,70.012
  VCC w0.254: v1(50.04,73.785) 54.862,73.785 56.134,75.057 v1(56.134,76.327)
+24: C501.2 C502.2 C503.2 C504.2 C505.2 C506.2 C507.2 CN201.2 Q1.5 Q1.6 Q1.7 Q1.8 Q3.5 Q3.6 Q3.7 Q3.8 Q5.5 Q5.6 Q5.7 Q5.8 U202.2 U202.3 | length 11.2
  Top Layer w1.5: 47.371,89.789 47.371,94.234 48.974,95.837 CN201.2
A_OUT: CN301.4 U301.8 | length 7.8
  Top Layer w0.2: CN301.4 54.864,61.849 54.864,63.947 56.154,65.237 U301.8
B_OUT: CN301.7 U302.8 | length 21
  Top Layer w0.2: v2(66.421,65.278) 66.442,65.257 68.638,65.257 U302.8
  VCC w0.2: CN301.7 58.166,56.007 65.151,56.007 66.421,57.277 v2(66.421,65.278)
GND: C202.1 C203.1 C204.1 C205.1 C206.1 C207.2 C210.1 C215.1 C216.1 C217.1 C218.1 C219.1 C301.1 C302.1 C501.1 C502.1 C503.1 C504.1 C505.1 C506.1 C507.1 CN201.1 CN301.5 NT2.1 NT4.1 Q4.1 Q4.2 Q4.3 R201.1 R203.2 R208.1 R507.1 R508.1 R509.1 R510.2 R511.2 U202.1 U202.9 U203.2 U204.2 U301.4 U301.7 U302.4 U302.7 U303.6
  other v1: 72.136,55.88 73.036,55.88 73.936,55.88 74.836,55.88 75.736,55.88 76.636,55.88 77.536,55.88 78.436,55.88 80.772,55.88 81.672,55.88 82.572,55.88 83.472,55.88 84.372,55.88 85.272,55.88 86.172,55.88 87.072,55.88 72.136,56.78 73.036,56.78 73.936,56.78 74.836,56.78 75.736,56.78 76.636,56.78 77.536,56.78 78.436,56.78 80.772,56.78 81.672,56.78 82.572,56.78 83.472,56.78 84.372,56.78 85.272,56.78 86.172,56.78 87.072,56.78 42.026,56.885 42.926,56.885 43.826,56.885 72.136,57.68 73.036,57.68 73.936,57.68 74.836,57.68 75.736,57.68 76.636,57.68 77.536,57.68 78.436,57.68 80.772,57.68 81.672,57.68 82.572,57.68 83.472,57.68 84.372,57.68 85.272,57.68 86.172,57.68 87.072,57.68 42.026,57.785 42.926,57.785 43.826,57.785 78.486,58.42 50.292,58.547 51.192,58.547 52.092,58.547 52.992,58.547 72.136,58.58 73.036,58.58 73.936,58.58 74.836,58.58 75.736,58.58 76.636,58.58 77.536,58.58 80.772,58.58 81.672,58.58 82.572,58.58 83.472,58.58 84.372,58.58 85.272,58.58 86.172,58.58 87.072,58.58 42.026,58.685 42.926,58.685 43.826,58.685 50.292,59.447 51.192,59.447 52.092,59.447 52.992,59.447 72.136,59.48 73.036,59.48 73.936,59.48 74.836,59.48 75.736,59.48 76.636,59.48 77.536,59.48 81.672,59.48 82.572,59.48 83.472,59.48 84.372,59.48 85.272,59.48 86.172,59.48 87.072,59.48 42.026,59.585 42.926,59.585 43.826,59.585 50.292,60.347 51.192,60.347 52.092,60.347 52.992,60.347 84.963,61.954 85.863,61.954 86.763,61.954 87.663,61.954 88.563,61.954 84.963,62.854 85.863,62.854 86.763,62.854 87.663,62.854 88.563,62.854 84.963,63.754 85.863,63.754 86.763,63.754 87.663,63.754 88.563,63.754 84.963,64.654 85.863,64.654 86.763,64.654 87.663,64.654 88.563,64.654 84.963,65.554 85.863,65.554 86.763,65.554 87.663,65.554 88.563,65.554 71.766,65.913 72.666,65.913 70.866,66.04 50.8,66.548 51.7,66.548 52.6,66.548 53.5,66.548 70.866,66.813 71.766,66.813 72.666,66.813 76.073,67.034 76.973,67.034 77.873,67.034 78.773,67.034 79.673,67.034 50.8,67.448 51.7,67.448 52.6,67.448 53.5,67.448 70.866,67.713 71.766,67.713 72.666,67.713 76.073,67.934 76.973,67.934 77.873,67.934 78.773,67.934 79.673,67.934 50.8,68.348 51.7,68.348 52.6,68.348 53.5,68.348 76.073,68.834 76.973,68.834 77.873,68.834 78.773,68.834 79.673,68.834 65.913,69.342 79.248,70.071 80.148,70.071 81.048,70.071 81.948,70.071 82.848,70.071 83.748,70.071 84.648,70.071 41.032,70.231 41.932,70.231 42.832,70.231 43.732,70.231 44.632,70.231 64.251,70.231 65.151,70.231 79.248,70.971 80.148,70.971 81.048,70.971 81.948,70.971 82.848,70.971 83.748,70.971 84.648,70.971 85.548,70.971 41.032,71.131 41.932,71.131 42.832,71.131 43.732,71.131 44.632,71.131 63.351,71.131 64.251,71.131 65.151,71.131 79.248,71.871 80.148,71.871 81.048,71.871 81.948,71.871 82.848,71.871 83.748,71.871 84.648,71.871 85.548,71.871 41.032,72.031 41.932,72.031 42.832,72.031 43.732,72.031 44.632,72.031 79.248,72.771 80.148,72.771 81.048,72.771 81.948,72.771 82.848,72.771 83.748,72.771 84.648,72.771 85.548,72.771 41.032,72.931 41.932,72.931 42.832,72.931 43.732,72.931 44.632,72.931 41.032,73.831 41.932,73.831 42.832,73.831 43.732,73.831 44.632,73.831 51.816,75.162 50.472,75.184 51.043,75.184 50.472,76.084 51.043,76.084 51.816,76.062 57.785,76.073 58.685,76.073 59.585,76.073 51.816,76.962 57.785,76.973 58.685,76.973 59.585,76.973 50.472,76.984 51.043,76.984 82.55,77.139 83.45,77.139 84.35,77.139 85.25,77.139 86.15,77.139 87.05,77.139 87.95,77.139 51.816,77.862 50.472,77.884 51.043,77.884 82.55,78.039 83.45,78.039 84.35,78.039 85.25,78.039 86.15,78.039 87.05,78.039 87.95,78.039 88.85,78.039 65.024,78.834 65.924,78.834 82.55,78.939 83.45,78.939 84.35,78.939 85.25,78.939 86.15,78.939 87.05,78.939 87.95,78.939 88.85,78.939 65.024,79.734 65.924,79.734 82.55,79.839 83.45,79.839 84.35,79.839 85.25,79.839 86.15,79.839 87.05,79.839 87.95,79.839 88.85,79.839 65.024,80.634 65.924,80.634 82.55,80.739 83.45,80.739 84.35,80.739 85.25,80.739 86.15,80.739 87.05,80.739 87.95,80.739 88.85,80.739 65.024,81.534 65.924,81.534 82.55,81.639 83.45,81.639 84.35,81.639 85.25,81.639 86.15,81.639 87.05,81.639 87.95,81.639 88.85,81.639 82.55,82.539 83.45,82.539 84.35,82.539 85.25,82.539 86.15,82.539 87.05,82.539 87.95,82.539 88.85,82.539 82.55,83.439 83.45,83.439 84.35,83.439 85.25,83.439 86.15,83.439 87.05,83.439 87.95,83.439 88.85,83.439 40.894,86.062 41.794,86.062 40.894,86.962 41.794,86.962 40.894,87.862 41.794,87.862 40.894,88.762 41.794,88.762 81.661,89.458 82.561,89.458 83.461,89.458 84.361,89.458 85.261,89.458 86.161,89.458 87.061,89.458 40.894,89.662 41.794,89.662 81.661,90.358 82.561,90.358 83.461,90.358 84.361,90.358 85.261,90.358 86.161,90.358 87.061,90.358 87.961,90.358 52.197,90.645 53.097,90.645 53.997,90.645 54.897,90.645 55.797,90.645 81.661,91.258 82.561,91.258 83.461,91.258 84.361,91.258 85.261,91.258 86.161,91.258 87.061,91.258 87.961,91.258 52.197,91.545 53.097,91.545 53.997,91.545 54.897,91.545 55.797,91.545 81.661,92.158 82.561,92.158 83.461,92.158 84.361,92.158 85.261,92.158 86.161,92.158 87.061,92.158 87.961,92.158 52.197,92.445 53.097,92.445 53.997,92.445 54.897,92.445 55.797,92.445 81.661,93.058 82.561,93.058 83.461,93.058 84.361,93.058 85.261,93.058 86.161,93.058 87.061,93.058 87.961,93.058 52.197,93.345 53.097,93.345 53.997,93.345 54.897,93.345 55.797,93.345 81.661,93.958 82.561,93.958 83.461,93.958 84.361,93.958 85.261,93.958 86.161,93.958 87.061,93.958 87.961,93.958 45.593,94.361 81.661,94.858 82.561,94.858 83.461,94.858 84.361,94.858 85.261,94.858 86.161,94.858 87.061,94.858 87.961,94.858 41.579,95.504 42.479,95.504 43.379,95.504 44.279,95.504 45.179,95.504 46.079,95.504 46.979,95.504 81.661,95.758 82.561,95.758 83.461,95.758 84.361,95.758 85.261,95.758 86.161,95.758 87.061,95.758 87.961,95.758 41.579,96.404 42.479,96.404 43.379,96.404 44.279,96.404 45.179,96.404 46.079,96.404 46.979,96.404 47.879,96.404 41.579,97.304 42.479,97.304 43.379,97.304 44.279,97.304 45.179,97.304 46.079,97.304 46.979,97.304 47.879,97.304 41.579,98.204 42.479,98.204 43.379,98.204 44.279,98.204 45.179,98.204 46.079,98.204 46.979,98.204 47.879,98.204 73.66,98.221 74.56,98.221 75.46,98.221 76.36,98.221 77.26,98.221 78.16,98.221 79.06,98.221 41.579,99.104 42.479,99.104 43.379,99.104 44.279,99.104 45.179,99.104 46.079,99.104 46.979,99.104 47.879,99.104 73.66,99.121 74.56,99.121 75.46,99.121 76.36,99.121 77.26,99.121 78.16,99.121 79.06,99.121 79.96,99.121 41.579,100.004 42.479,100.004 43.379,100.004 44.279,100.004 45.179,100.004 46.079,100.004 46.979,100.004 47.879,100.004 73.66,100.021 74.56,100.021 75.46,100.021 76.36,100.021 77.26,100.021 78.16,100.021 79.06,100.021 79.96,100.021 56.007,100.794 56.907,100.794 57.807,100.794 58.707,100.794 59.607,100.794 60.507,100.794 61.407,100.794 62.307,100.794 41.579,100.904 42.479,100.904 43.379,100.904 44.279,100.904 45.179,100.904 46.079,100.904 46.979,100.904 47.879,100.904 66.167,100.921 67.067,100.921 67.967,100.921 68.867,100.921 69.767,100.921 70.667,100.921 71.567,100.921 72.467,100.921 73.66,100.921 74.56,100.921 75.46,100.921 76.36,100.921 77.26,100.921 78.16,100.921 79.06,100.921 79.96,100.921 56.007,101.694 56.907,101.694 57.807,101.694 58.707,101.694 59.607,101.694 60.507,101.694 61.407,101.694 62.307,101.694 41.579,101.804 42.479,101.804 43.379,101.804 44.279,101.804 45.179,101.804 46.079,101.804 46.979,101.804 47.879,101.804 66.167,101.821 67.067,101.821 67.967,101.821 68.867,101.821 69.767,101.821 70.667,101.821 71.567,101.821 72.467,101.821 73.66,101.821 74.56,101.821 75.46,101.821 76.36,101.821 77.26,101.821 78.16,101.821 79.06,101.821 79.96,101.821 56.007,102.594 56.907,102.594 57.807,102.594 58.707,102.594 59.607,102.594 60.507,102.594 61.407,102.594 62.307,102.594 66.167,102.721 67.067,102.721 67.967,102.721 68.867,102.721 69.767,102.721 70.667,102.721 71.567,102.721 72.467,102.721 73.66,102.721 74.56,102.721 75.46,102.721 76.36,102.721 77.26,102.721 78.16,102.721 79.06,102.721 79.96,102.721 56.007,103.494 56.907,103.494 57.807,103.494 58.707,103.494 59.607,103.494 60.507,103.494 61.407,103.494 62.307,103.494 66.167,103.621 67.067,103.621 67.967,103.621 68.867,103.621 69.767,103.621 70.667,103.621 71.567,103.621 72.467,103.621 73.66,103.621 74.56,103.621 75.46,103.621 76.36,103.621 77.26,103.621 78.16,103.621 79.06,103.621 79.96,103.621 56.007,104.394 56.907,104.394 57.807,104.394 58.707,104.394 59.607,104.394 60.507,104.394 61.407,104.394 62.307,104.394 66.167,104.521 67.067,104.521 67.967,104.521 68.867,104.521 69.767,104.521 70.667,104.521 71.567,104.521 72.467,104.521 73.66,104.521 74.56,104.521 75.46,104.521 76.36,104.521 77.26,104.521 78.16,104.521 79.06,104.521 79.96,104.521
  other v3: 46.071,86.599 47.371,86.599 48.671,86.599 46.071,87.899 47.371,87.899 48.671,87.899
HIN1: CN301.3 U303.22 | length 25.2
  Top Layer w0.2: U303.22 52.709,78.744 52.451,78.486 52.451,70.485 54.102,68.834 v2(57.912,68.834)
  GND w0.2: v2(57.912,68.834) 59.309,67.437 CN301.3
HIN2: CN301.2 U303.23 | length 27.7
  Top Layer w0.2: U303.23 53.026,78.244 52.832,78.05 52.832,71.247 54.61,69.469 v2(58.928,69.469)
  GND w0.2: v2(58.928,69.469) 59.632,69.469 63.881,65.22 63.881,61.976 CN301.2
HIN3: CN301.1 U303.24 | length 25.5
  Top Layer w0.2: U303.24 53.35,77.744 53.233,77.627 53.233,72.37 55.499,70.104 v2(59.563,70.104)
  GND w0.2: v2(59.563,70.104) 64.389,65.278 CN301.1
LIN1: CN301.8 U303.1 | length 21.6
  Top Layer w0.2: v2(54.61,72.136) 54.61,77.066 U303.1
  VCC w0.2: v2(54.61,72.136) 54.61,66.802 58.166,63.246 58.166,58.547 CN301.8
LIN2: CN301.9 U303.2 | length 22.5
  Top Layer w0.2: U303.2 55.13,73.267 55.499,72.898 v2(55.499,72.136)
  VCC w0.2: v2(55.499,72.136) 55.499,67.183 60.452,62.23 60.452,58.801 CN301.9
LIN3: CN301.10 U303.3 | length 23.3
  Top Layer w0.2: U303.3 55.63,73.529 56.388,72.771 v2(56.388,72.136)
  VCC w0.2: v2(56.388,72.136) 56.388,67.564 63.119,60.833 63.119,58.674 CN301.10
NetC201_1: C201.1 U202.7 | length 2.3
  Top Layer w0.25: C201.1@47.712,82.169 48.006,82.463 U202.7
NetC201_2: C201.2 L201.1 U202.8 | length 6.6
  Top Layer w0.5: L201.1@46.355,80.221 48.344,80.221 49.189,81.066 C201.2@49.189,82.119 ; C201.2 C201.2@49.189,82.119 ; C201.2@49.276,82.209 U202.8 ; C201.2@49.316,82.169 49.239,82.169 C201.2@49.189,82.119
NetC207_1: C207.1 R206.1 | length 1.9
  Top Layer w0.4: R206.1 42.062,64.249 42.062,62.369 C207.1
NetC208_1: C208.1 L202.1 R206.2 U203.6 | length 6.4
  Top Layer w0.4: R206.2 C208.1 ; U203.6 45.029,65.334 45.339,65.024 45.339,64.299 C208.1 ; L202.1 45.576,62.314 45.376,62.514 C208.1
NetC208_2: C208.2 U203.1 | length 2
  Top Layer w0.4: C208.2 46.863,64.299 46.863,65.55 47.292,65.979 U203.1
NetC306_1: C306.1 D303.1 U303.20 | length 8.5
  Top Layer w0.2: D303.1 52.451,85.344 C306.1 52.197,80.899 53.34,79.756 53.961,79.756 U303.20
NetC307_1: C307.1 D302.1 U303.17 | length 6.4
  Top Layer w0.2: C307.1 54.511,84.046 55.13,83.427 U303.17 ; C307.1@54.54,85.153 54.54,86.826 D302.1
NetC308_2: C308.2 D301.1 U303.14 | length 6.3
  Top Layer w0.2: U303.14 56.63,84.895 C308.2 56.825,86.84 D301.1
NetNT1_1: NT1.1 Q2.1 Q2.2 Q2.3 R510.1
NetNT3_1: NT3.1 Q6.1 Q6.2 Q6.3 R511.1
NetQ1_4: Q1.4 R501.2 | length 10.2
  Top Layer w0.254: R501.2 v4(73.787,83.185)
  Bottom Layer w0.254: Q1.4 72.705,84.241 73.366,84.241 73.787,83.82 v4(73.787,83.185)
NetQ2_4: Q2.4 R502.2 R507.2 | length 6.1
  Top Layer w0.254: R507.2 R502.2 66.704,84.201 66.831,84.328 Q2.4
  Top Layer w0.5: R502.2@62.714,84.201 R502.2@62.726,84.189
NetQ3_4: Q3.4 R503.2 | length 10.6
  Top Layer w0.254: R503.2 73.593,76.708 73.974,77.089 v4(74.041,77.089)
  Bottom Layer w0.254: Q3.4 73.787,77.851 73.994,77.644 73.994,77.136 v4(74.041,77.089)
NetQ4_4: Q4.4 R504.2 R508.2 | length 6.2
  Top Layer w0.254: R508.2 R504.2 62.726,77.851 Q4.4
NetQ5_4: Q5.4 R505.2 | length 4.3
  Top Layer w0.254: R505.2 73.787,69.469 74.168,69.85 v4(74.168,70.485) v4@74.121,70.438
  Bottom Layer w0.254: Q5.4 73.66,71.501 74.121,71.04 74.121,70.532 v4(74.168,70.485)
NetQ6_4: Q6.4 R506.2 R509.2 | length 4.7
  Top Layer w0.254: Q6.4@67.208,71.624 67.302,71.53 67.916,71.53 68.991,70.455 68.991,69.808 R509.2 R506.2
NetR201_2: R201.2 U202.4 | length 2.3
  Top Layer w0.25: R201.2 cw(c43.273,90.031) 43.273,90.124 U202.4
NetR202_1: R202.1 R203.1 U202.5 | length 6.7
  Top Layer w0.25: R202.1@43.053,79.871 43.053,83.439 43.225,83.611 43.225,84.183 R203.1 45.357,84.265 U202.5
NetR204_2: R204.2 U203.4 | length 2
  Top Layer w0.5: R204.2@43.342,68.453 44.455,68.453 44.879,68.029 44.879,67.894 44.895,67.879 U203.4
NetR207_2: R207.2 R208.2 U203.3 | length 9.5
  Top Layer w0.2: U203.3 48.453,67.879 48.768,67.564 48.768,61.964 R207.2 R208.2
NetR501_1: R501.1 U303.19 | length 13.1
  Top Layer w0.25: U303.19 53.957,80.259 53.944,80.259 53.944,83.014 53.975,83.044 v1(53.975,83.058)
  Bottom Layer w0.2: v1(53.975,83.058) 54.483,83.566 v2(64.008,83.566)
NetR502_1: R502.1 U303.11 | length 6.9
  Top Layer w0.2: U303.11 58.408,79.744 58.897,80.233 58.897,83.154 59.944,84.201 R502.1
NetR503_1: R503.1 U303.16 | length 14.9
  Top Layer w0.25: v1(55.628,82.294) 55.628,80.904 U303.16
  Bottom Layer w0.25: v1(55.628,82.294) 56.265,82.931 62.23,82.931 64.135,81.026 v2(64.135,77.089)
NetR504_1: R504.1 U303.10 | length 3.9
  Top Layer w0.25: U303.10 59.059,79.244 60.325,77.978 60.845,77.978 R504.1
NetR505_1: R505.1 U303.13 | length 21.5
  Top Layer w0.25: U303.13 57.145,80.917 57.145,81.139 57.15,81.144 v1(57.15,81.788)
  Bottom Layer w0.25: v1(57.15,81.788) 65.786,73.152 65.786,70.612 66.929,69.469 v2(71.12,69.469)
NetR506_1: R506.1 U303.9 | length 17.1
  Top Layer w0.254: U303.9@57.801,78.731 U303.9 58.543,78.744 60.96,76.327 60.96,71.501 64.277,68.184 67.464,68.184 R506.1
SH1_N: NT2.0 U301.3 | length 39.8
  Top Layer w0.2: v2(50.038,63.881) 50.066,63.909 51.527,63.909 U301.3 ; NT2.0 v2(61.341,91.313)
  GND w0.2: v2(50.038,63.881) 49.352,64.567 49.352,84.785 53.083,88.516 59.321,88.516 61.738,90.932 61.738,91.097 61.579,91.256 61.398,91.256 v2(61.341,91.313)
SH1_P: NT1.0 U301.2 | length 38.9
  Top Layer w0.2: v2(50.292,64.643) 50.32,64.615 51.527,64.615 U301.2 ; v2(62.484,91.313) NT1.0
  GND w0.2: v2(50.292,64.643) 50.235,64.7 49.981,64.7 49.702,64.979 49.702,84.64 53.228,88.166 59.466,88.166 62.088,90.787 62.088,91.097 62.246,91.256 62.427,91.256 v2(62.484,91.313)
SH2_N: NT4.0 U302.3 | length 13.7
  Top Layer w0.2: NT4.0 v2(60.198,73.533) ; v2(61.214,63.754) 61.295,63.754 61.478,63.937 U302.3
  VCC w0.2: v2@60.213,73.533 v2(60.198,73.533) 60.224,73.507 60.731,73.507 60.848,73.389 60.848,69.313 60.441,68.906 60.441,64.882 61.202,64.12 61.202,63.766 v2(61.214,63.754)
SH2_P: NT3.0 U302.2 | length 12.8
  Top Layer w0.2: v2(61.595,64.643) 61.623,64.615 62.83,64.615 U302.2 U302.2@62.842,64.57 ; v2(61.849,73.533) NT3.0
  VCC w0.2: v2(61.595,64.643) 61.574,64.622 61.196,64.622 60.791,65.027 60.791,68.761 61.198,69.168 61.198,73.389 61.316,73.507 61.823,73.507 v2(61.849,73.533) v2@61.833,73.533
U: C306.2 CN501.1 Q1.1 Q1.2 Q1.3 Q2.5 Q2.6 Q2.7 Q2.8 U303.18 | length 32.3
  Top Layer w0.2: v1(53.213,85.979) 53.157,85.923 C306.2 53.248,84.999 53.248,84.547 54.63,83.165 U303.18
  VCC w0.2: v1(53.213,85.979) 54.483,87.249 74.549,87.249 76.962,84.836 76.962,83.538 CN501.1
V: C307.2 CN501.2 Q3.1 Q3.2 Q3.3 Q4.5 Q4.6 Q4.7 Q4.8 U303.15 | length 30
  Top Layer w0.2: C307.2@55.372,85.09 55.372,84.328 56.134,83.566 56.134,80.906 U303.15 ; C307.2 55.485,85.104 v1(55.485,85.926)
  VCC w0.2: v1(55.485,85.926) 55.485,85.965 56.261,86.741 61.595,86.741 68.199,80.137 76.863,80.137 CN501.2
W: C308.1 CN501.3 Q5.1 Q5.2 Q5.3 Q6.5 Q6.6 Q6.7 Q6.8 U303.12 | length 34.5
  Top Layer w0.2: v1(57.785,85.979) C308.1 57.785,82.423 58.547,81.661 58.547,80.645 58.166,80.264 57.808,80.264 U303.12
  VCC w0.2: v1(57.785,85.979) 57.785,80.899 63.881,74.803 75.926,74.803 77,75.878 CN501.3
pads on no net: CN201.3 CN201.4 CN501.4 CN501.5 U202.6 U204.4 U301.1 U302.1 U303.5 U303.7 U303.8 U303.21 U303.25

## Polygon pours and split planes (outlines as drawn)
GND on Top Layer "GND_L01_P054" (solid, pour order 54): 42.473,54.875 cw(c42.496,57.502) 39.869,57.502 cw(c39.996,57.502) 39.873,57.532 39.873,103.491 cw(c39.998,103.516) 39.87,103.516 cw(c42.498,103.516) 42.498,106.143 cw(c42.498,106.016) 42.559,106.127 87.494,106.127 cw(c87.494,106) 87.539,106.119 cw(c87.494,103.492) 90.121,103.531 cw(c90,103.492) 90.127,103.492 90.127,57.548 cw(c90.007,57.507) 90.134,57.507 cw(c87.507,57.507) 87.55,54.88 cw(c87.507,55) 87.507,54.873 42.496,54.873 cw(c42.496,55)
GND on Top Layer "GND_L01_P000" (solid, pour order 0): 49.911,103.886 70.231,103.886 cw(c70.231,102.362) 71.755,102.362 71.755,100.076 cw(c70.485,100.076) 70.485,98.806 49.784,98.806 cw(c49.784,99.822) 48.768,99.822 48.768,102.743 cw(c49.911,102.743)
U on Top Layer "U_L01_P037" (solid, pour order 37): 77.089,88.9 cw(c77.089,87.503) 78.486,87.503 78.486,83.058 cw(c77.47,83.058) 77.47,82.042 76.454,82.042 cw(c76.454,83.058) 75.438,83.058 ccw(c74.803,83.058) 74.803,83.693 68.834,83.693 cw(c68.834,84.201) 68.326,84.201 68.326,88.392 cw(c68.834,88.392) 68.834,88.9
V on Top Layer "V_L01_P038" (solid, pour order 38): 77.724,81.534 cw(c77.724,80.772) 78.486,80.772 78.486,79.375 cw(c77.851,79.375) 77.851,78.74 74.295,78.74 ccw(c74.295,78.359) 73.914,78.359 73.914,77.978 cw(c73.406,77.978) 73.406,77.47 68.453,77.47 cw(c68.453,77.597) 68.326,77.597 68.326,81.818 cw(c68.698,81.839) 68.42,82.087 cw(c68.647,81.818) 68.677,82.169 74.848,82.169 cw(c74.848,81.833) 75.184,81.833 75.184,81.788 ccw(c75.438,81.788) 75.438,81.534
W on Top Layer "W_L01_P040" (solid, pour order 40): 76.073,77.724 77.597,77.724 cw(c77.597,76.962) 78.359,76.962 78.359,72.009 cw(c77.47,72.009) 77.47,71.12 68.961,71.12 cw(c68.961,71.501) 68.58,71.501 68.58,75.438 cw(c68.834,75.438) 68.834,75.692 74.168,75.692 ccw(c74.168,76.962) 75.438,76.962 75.438,77.089 cw(c76.073,77.089)
+24 on Top Layer "+24_L01_P039" (solid, pour order 39): 70.104,94.361 ccw(c70.104,95.758) 71.501,95.758 71.501,97.155 ccw(c70.358,97.155) 70.358,98.298 50.292,98.298 ccw(c50.292,97.536) 49.53,97.536 49.53,95.123 ccw(c50.292,95.123) 50.292,94.361
GND on Top Layer "GND_L01_P043" (solid, pour order 43): 64.509,82.169 67.437,82.169 cw(c67.437,81.788) 67.818,81.788 67.818,78.867 cw(c67.437,78.867) 67.437,78.486 64.516,78.486 cw(c64.516,78.867) 64.135,78.867 64.135,81.795 cw(c64.509,81.795)
NetNT3_1 on Top Layer "NETNT3_1_L01_P042" (solid, pour order 42): 63.881,75.692 67.564,75.692 cw(c67.564,75.311) 67.945,75.311 67.945,72.517 cw(c67.437,72.517) 67.437,72.009 63.754,72.009 cw(c63.754,72.39) 63.373,72.39 63.373,75.184 cw(c63.881,75.184)
NetNT1_1 on Top Layer "NETNT1_1_L01_P041" (solid, pour order 41): 66.929,93.472 cw(c66.929,92.583) 67.818,92.583 67.818,85.725 cw(c66.929,85.725) 66.929,84.836 64.897,84.836 cw(c64.897,85.598) 64.135,85.598 64.135,92.71 cw(c64.897,92.71) 64.897,93.472
GND on Bottom Layer "GND_L04_P053" (solid, pour order 53): 42.473,54.875 cw(c42.496,57.502) 39.869,57.502 cw(c39.996,57.502) 39.873,57.532 39.873,103.491 cw(c39.998,103.516) 39.87,103.516 cw(c42.498,103.516) 42.498,106.143 cw(c42.498,106.016) 42.559,106.127 87.494,106.127 cw(c87.494,106) 87.539,106.119 cw(c87.494,103.492) 90.121,103.531 cw(c90,103.492) 90.127,103.492 90.127,57.548 cw(c90.007,57.507) 90.134,57.507 cw(c87.507,57.507) 87.55,54.88 cw(c87.507,55) 87.507,54.873 42.496,54.873 cw(c42.496,55)
U on Bottom Layer "U_L04_P025" (solid, pour order 25): 72.517,88.9 77.089,88.9 cw(c77.089,87.503) 78.486,87.503 78.486,83.058 cw(c77.47,83.058) 77.47,82.042 76.327,82.042 cw(c76.327,82.931) 75.438,82.931 75.438,84.328 ccw(c74.803,84.328) 74.803,84.963 72.39,84.963 cw(c72.39,85.471) 71.882,85.471 71.882,88.265 cw(c72.517,88.265)
V on Bottom Layer "V_L04_P027" (solid, pour order 27): 72.136,82.042 74.803,82.042 cw(c74.803,81.661) 75.184,81.661 ccw(c75.438,81.661) 75.438,81.407 77.597,81.407 cw(c77.597,80.518) 78.486,80.518 78.486,79.375 cw(c77.724,79.375) 77.724,78.613 72.263,78.613 cw(c72.263,78.994) 71.882,78.994 71.882,81.788 cw(c72.136,81.788)
W on Bottom Layer "W_L04_P028" (solid, pour order 28): 72.517,72.263 77.343,72.263 ccw(c77.343,73.279) 78.359,73.279 78.359,76.962 ccw(c77.597,76.962) 77.597,77.724 76.2,77.724 ccw(c76.2,76.962) 75.438,76.962 cw(c74.549,76.962) 74.549,76.073 72.517,76.073 ccw(c72.517,75.565) 72.009,75.565 72.009,72.771 ccw(c72.517,72.771)
+24 on Bottom Layer "+24_L04_P044" (solid, pour order 44): 52.324,98.298 70.485,98.298 cw(c70.485,97.282) 71.501,97.282 71.501,71.247 cw(c71.12,71.247) 71.12,70.866 66.675,70.866 cw(c66.675,71.247) 66.294,71.247 66.294,93.726 ccw(c65.659,93.726) 65.659,94.361 52.451,94.361 cw(c52.451,94.996) 51.816,94.996 51.816,97.79 cw(c52.324,97.79)
GND on GND "GND_L02_P051" (solid, pour order 51): 42.473,54.875 cw(c42.496,57.502) 39.869,57.502 cw(c39.996,57.502) 39.873,57.532 39.873,103.491 cw(c39.998,103.516) 39.87,103.516 cw(c42.498,103.516) 42.498,106.143 cw(c42.498,106.016) 42.559,106.127 87.494,106.127 cw(c87.494,106) 87.539,106.119 cw(c87.494,103.492) 90.121,103.531 cw(c90,103.492) 90.127,103.492 90.127,57.548 cw(c90.007,57.507) 90.134,57.507 cw(c87.507,57.507) 87.55,54.88 cw(c87.507,55) 87.507,54.873 42.496,54.873 cw(c42.496,55)